# Allegro board 80DB_LIDAR.brd
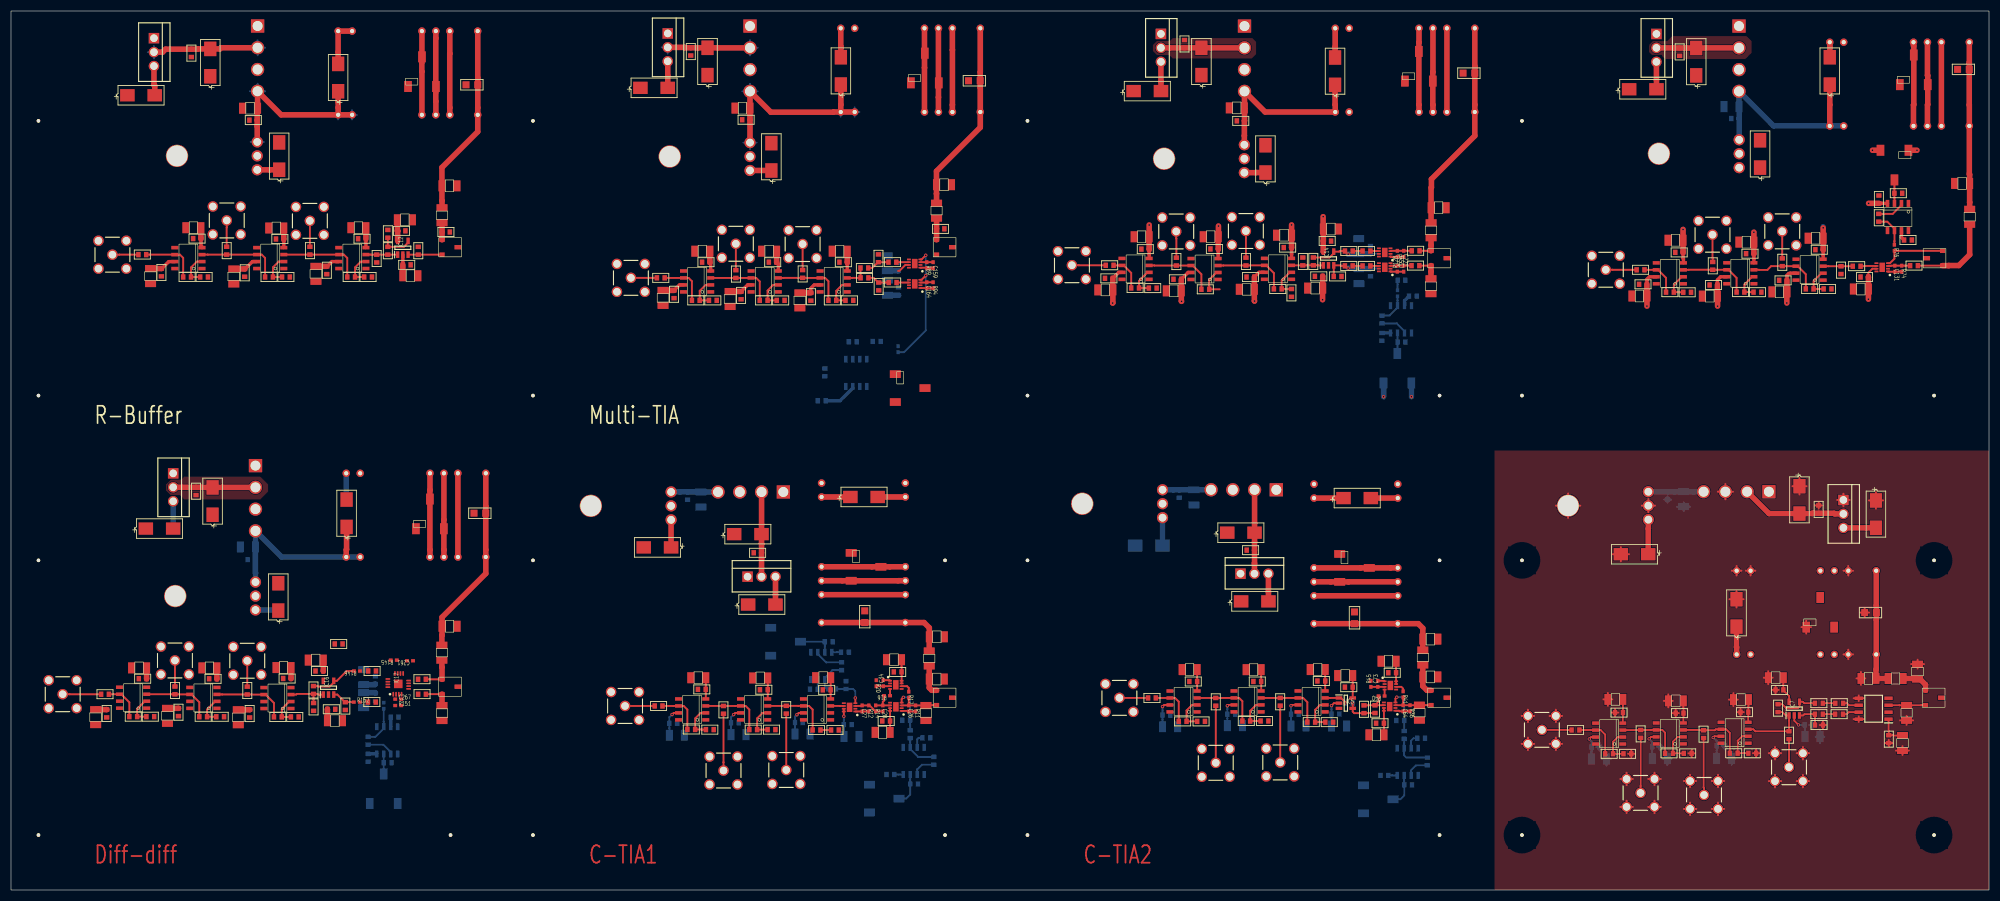
[diagram p0: board, top side]
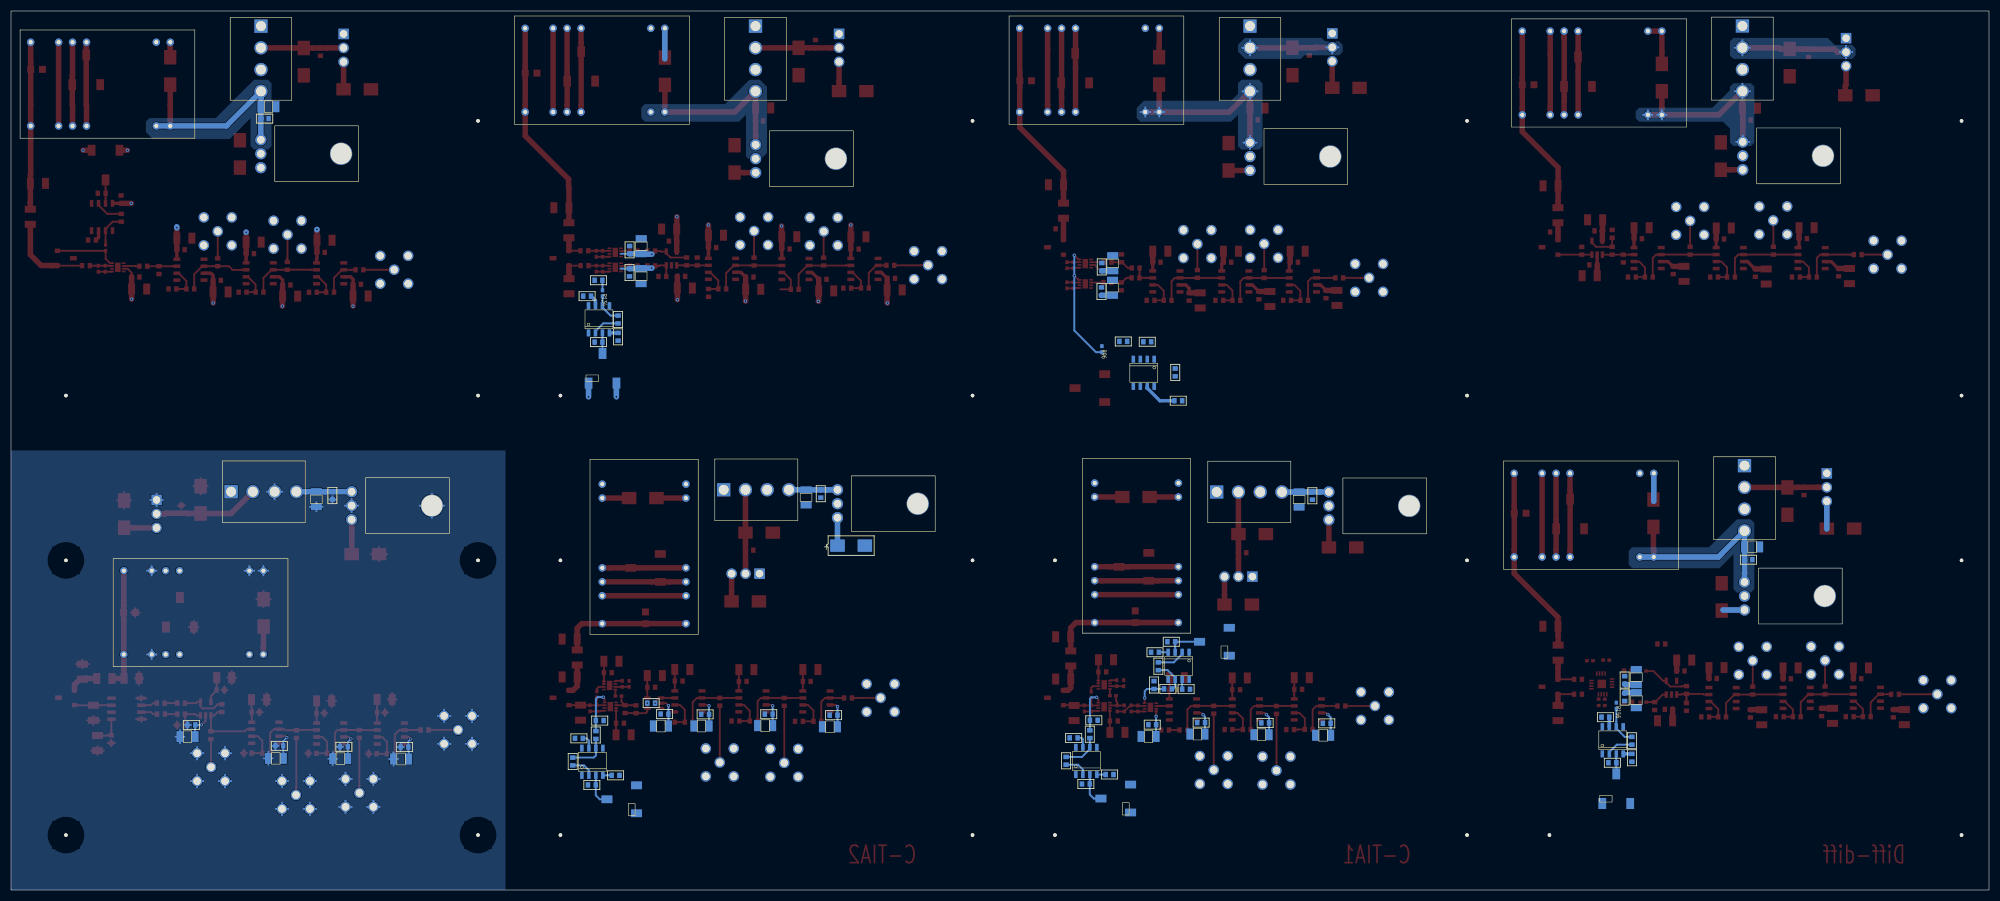
[diagram p1: board, bottom side, seen from below]

Outline 360 x 160 mm; copper layers: TOP, GND, PWD, BOTTOM. Coordinates in mm from the lower left corner of the outline.
Outline path: rectangle 0,0 360,160

## Design rules (mm)
constraint set DEFAULT: min track width 0.127

## Placement (name value [footprint] x y rotation side)
C1  6.8uF_3216  [SMC321612]  125.56 71.08 270 bottom
C2  0.47uF_1608  [SMC1608]  123.14 72.47 270 bottom
C3  10uF_6032  [SMC603212]  120.14 62.36 180 top
C4  47uF_6032  [SMC603212]  152.76 71.54 0 top
C5  4.7nF_2012_250V  [SMC2012]  155.38 48.68 90 top
C6  10uF_6032  [SMC603212]  131.62 64.78 0 top
C7  0.47uF_1608  [SMC1608]  135.18 61.39 0 top
C8  10uF_6032  [SMC603212]  134.16 51.96 0 top
C9  0.1u_1608  [SMC1608]  144.11 30.48 180 bottom
C10  6.8u_3216  [SMC321612]  144.07 28.38 0 bottom
C11  0.1u_1608  [SMC1608]  132.45 30.43 180 bottom
C12  6.8u_3216  [SMC321612]  132.4 28.27 0 bottom
C13  0.1u_1608  [SMC1608]  121.24 30.34 180 bottom
C14  6.8u_3216  [SMC321612]  121.19 28.17 0 bottom
C15  0.1u_1608  [SMC1608]  147.75 36.44 0 top
C16  6.8u_3216  [SMC321612]  147.81 38.65 180 top
C17  0.1u_1608  [SMC1608]  136.31 36.46 0 top
C18  6.8u_3216  [SMC321612]  136.36 38.6 180 top
C19  0.1u_1608  [SMC1608]  125.02 36.52 0 top
C20  6.8u_3216  [SMC321612]  125.08 38.64 180 top
C21  0.1u_1608  [SMC1608]  158.57 30.76 0 top
C22  6.8u_3216  [SMC321612]  158.63 28.69 180 top
C23  0.1u_1608  [SMC1608]  153 30.1 180 bottom
C24  6.8u_3216  [SMC321612]  152.96 27.95 0 bottom
C25  1n_3216  [SMC321612]  168.5 38.4 180 top
C26  0.2p_1005  [SMR1005]  163.4 33.05 270 top
C27  4p_1005  [SMR1005]  154.91 33.05 270 top
C28  1n_1005  [SMR1005]  158.67 33.05 270 top
C29  1n_3216  [SMC321612]  168.51 46.09 180 top
C30  0.1u_1608  [SMC1608]  145.42 36.55 0 bottom
C31  0.1u_1608  [SMC1608]  167.31 27.7 180 bottom
C32  0.1u_1608  [SMC1608]  151.98 36.6 90 bottom
C33  0.1u_1608  [SMC1608]  163.64 30.9 180 bottom
C34  100n_1005  [SMR1005]  158.76 37.64 90 top
C35  0.1u_1608  [SMC1608]  149.54 45.19 180 bottom
C36  0.1u_1608  [SMC1608]  165.08 19.3 180 bottom
C37  0.1u_1608  [SMC1608]  152.5 43.28 180 bottom
C38  0.1u_1608  [SMC1608]  160.67 39.7 0 top
C39  6.8u_3216  [SMC321612]  160.71 41.92 180 top
C40  0.1u_1608  [SMC1608]  159.34 21.02 0 bottom
C41  6.8uF_3216  [SMC321612]  215.3 71.47 270 bottom
C42  0.47uF_1608  [SMC1608]  212.62 72.84 270 bottom
C43  10uF_6032  [SMC603212]  209.58 62.69 180 bottom
C44  47uF_6032  [SMC603212]  242.52 71.34 0 top
C45  4.7nF_2012_250V  [SMC2012]  244.52 48.48 90 top
C46  10uF_6032  [SMC603212]  221.35 65.04 0 top
C47  0.47uF_1608  [SMC1608]  224.9 61.86 0 top
C48  10uF_6032  [SMC603212]  223.88 52.54 0 top
C49  0.1u_1608  [SMC1608]  234.38 31.98 180 bottom
C50  6.8u_3216  [SMC321612]  234.33 29.85 0 bottom
C51  0.1u_1608  [SMC1608]  222.8 32.01 180 bottom
C52  6.8u_3216  [SMC321612]  222.75 29.92 0 bottom
C53  0.1u_1608  [SMC1608]  211 31.83 180 bottom
C54  6.8u_3216  [SMC321612]  210.95 29.71 0 bottom
C55  0.1u_1608  [SMC1608]  237.77 38.04 0 top
C56  6.8u_3216  [SMC321612]  237.82 40.13 180 top
C57  0.1u_1608  [SMC1608]  226.11 37.96 0 top
C58  6.8u_3216  [SMC321612]  226.16 40.11 180 top
C59  0.1u_1608  [SMC1608]  214.46 37.96 0 top
C60  6.8u_3216  [SMC321612]  214.51 40.12 180 top
C61  0.1u_1608  [SMC1608]  248.45 30.36 0 top
C62  6.8u_3216  [SMC321612]  248.51 28.25 180 top
C63  1n_3216  [SMC321612]  258.32 38.79 180 top
C64  0.2p_1005  [SMR1005]  253.37 33.09 270 top
C65  1n_1608  [SMC1608]  248.25 33.63 270 top
C66  1n_3216  [SMC321612]  258.32 45.67 180 top
C67  10u_3216  [SMC321612]  241.71 29.85 0 bottom
C68  0.1u_1608  [SMC1608]  241.76 32.03 180 bottom
C69  10u_3216  [SMC321612]  242.82 39.03 180 top
C70  0.1u_1608  [SMC1608]  242.77 36.92 0 top
C71  0.1u_1608  [SMC1608]  257.35 27.61 180 bottom
C72  0.1u_1608  [SMC1608]  253.56 30.85 180 bottom
C73  100n_1005  [SMR1005]  248.76 37.53 90 top
C74  0.1u_1608  [SMC1608]  254.99 19.13 180 bottom
C75  0.1u_1608  [SMC1608]  249.25 20.87 0 bottom
C76  0.1u_1608  [SMC1608]  250.67 39.55 0 top
C77  6.8u_3216  [SMC321612]  250.72 41.64 180 top
C78  6.8uF_3216  [SMC321612]  304.43 71.13 270 bottom
C79  0.47uF_1608  [SMC1608]  301.5 72.5 270 bottom
C80  10uF_6032  [SMC603212]  297.98 61.12 180 top
C81  47uF_6032  [SMC603212]  314.04 47.95 90 top
C82  4.7nF_2012_250V  [SMC2012]  339.5 50.5 180 top
C83  10uF_6032  [SMC603212]  325.5 73.5 270 top
C84  0.47uF_1608  [SMC1608]  329 70 270 top
C85  10uF_6032  [SMC603212]  339.42 70.91 270 top
C86  0.1u_1608  [SMC1608]  311.88 26.25 180 bottom
C87  6.8u_3216  [SMC321612]  311.8 23.98 0 bottom
C88  0.1u_1608  [SMC1608]  300.12 26.08 180 bottom
C89  6.8u_3216  [SMC321612]  300.07 23.9 0 bottom
C90  0.1u_1608  [SMC1608]  289.1 26.02 180 bottom
C91  6.8u_3216  [SMC321612]  289 23.85 0 bottom
C92  0.1u_1608  [SMC1608]  314.77 32.38 0 top
C93  6.8u_3216  [SMC321612]  314.85 34.65 180 top
C94  0.1u_1608  [SMC1608]  302.98 32.2 0 top
C95  6.8u_3216  [SMC321612]  303 34.42 180 top
C96  0.1u_1608  [SMC1608]  291.95 32.3 0 top
C97  6.8u_3216  [SMC321612]  292 34.7 180 top
C98  100n_1608  [SMC1608]  321.15 36.42 0 top
C99  10u_3216  [SMC321612]  321.19 38.64 180 top
C100  100n_1608  [SMC1608]  327.88 30.05 180 bottom
C101  10u_3216  [SMC321612]  327.87 27.9 0 bottom
C102  10n_1608  [SMC1608]  341.75 26.75 90 top
C103  6.8u_3216  [SMC321612]  344.25 26.75 270 top
C104  1n_3216  [SMC321612]  347 39.75 270 top
C105  0.1u_1608  [SMC1608]  332 32 0 top
C106  0.1u_1608  [SMC1608]  333.45 34 180 top
C107  1n_3216  [SMC321612]  338.06 38.52 0 top
C108  6.8uF_3216  [SMC321612]  313.15 142.58 180 bottom
C109  0.47uF_1608  [SMC1608]  314.53 140.42 180 bottom
C110  10uF_6032  [SMC603212]  318.33 131.49 90 top
C111  47uF_6032  [SMC603212]  331.02 146.6 90 top
C112  4.7nF_2012_250V  [SMC2012]  356.41 149.37 180 top
C113  10uF_6032  [SMC603212]  306.71 148.28 90 top
C114  0.47uF_1608  [SMC1608]  303.69 151.84 90 top
C115  10uF_6032  [SMC603212]  294.5 145.75 0 top
C116  0.1u_1608  [SMC1608]  321.81 110.97 0 top
C117  6.8u_3216  [SMC321612]  321.86 108.87 180 top
C118  0.1u_1608  [SMC1608]  309.14 110.13 0 top
C119  6.8u_3216  [SMC321612]  309.19 108.1 180 top
C120  0.1u_1608  [SMC1608]  296.31 110.25 0 top
C121  6.8u_3216  [SMC321612]  296.38 108.12 180 top
C122  0.1u_1608  [SMC1608]  328.39 116.55 0 top
C123  6.8u_3216  [SMC321612]  328.44 118.64 180 top
C124  0.1u_1608  [SMC1608]  315.79 115.83 0 top
C125  6.8u_3216  [SMC321612]  315.83 117.93 180 top
C126  0.1u_1608  [SMC1608]  302.89 116.06 0 top
C127  6.8u_3216  [SMC321612]  302.94 118.27 180 top
C128  1n_3216  [SMC321612]  355.1 128.61 0 top
C129  0.1u_1608  [SMC1608]  336.62 111.58 0 top
C130  6.8u_3216  [SMC321612]  336.68 109.39 180 top
C131  4p_1005  [SMR1005]  342.86 113.09 270 top
C132  1n_1608  [SMC1608]  347.06 113.65 180 top
C133  1n_1608  [SMC1608]  336.62 113.54 180 top
C134  0.1u_1608  [SMC1608]  345.96 118.31 180 top
C135  0.1u_1608  [SMC1608]  344.2 126.82 180 top
C136  0.1u_1608  [SMC1608]  339.96 126.41 270 top
C137  6.8uF_3216  [SMC321612]  133.13 142.32 180 top
C138  0.47uF_1608  [SMC1608]  134.5 140.2 180 top
C139  10uF_6032  [SMC603212]  138.39 130.97 90 top
C140  47uF_6032  [SMC603212]  151.04 146.61 90 top
C141  4.7nF_2012_250V  [SMC2012]  176.4 147.3 180 top
C142  10uF_6032  [SMC603212]  126.77 148.32 90 top
C143  0.47uF_1608  [SMC1608]  123.71 151.89 90 top
C144  10uF_6032  [SMC603212]  114.55 146.01 0 top
C145  0.1u_1608  [SMC1608]  145.57 107.28 90 top
C146  6.8u_3216  [SMC321612]  143.57 107.33 270 top
C147  0.1u_1608  [SMC1608]  132.88 107.53 90 top
C148  6.8u_3216  [SMC321612]  130.88 107.58 270 top
C149  0.1u_1608  [SMC1608]  120.68 107.72 90 top
C150  6.8u_3216  [SMC321612]  118.68 107.78 270 top
C151  0.1u_1608  [SMC1608]  150.78 114.28 0 top
C152  6.8u_3216  [SMC321612]  150.82 116.28 180 top
C153  0.1u_1608  [SMC1608]  137.93 114.28 0 top
C154  6.8u_3216  [SMC321612]  137.97 116.28 180 top
C155  0.1u_1608  [SMC1608]  125.78 114.28 0 top
C156  6.8u_3216  [SMC321612]  125.82 116.28 180 top
C157  0.1u_1608  [SMC1608]  161.47 114.12 270 bottom
C158  6.8u_3216  [SMC321612]  159.47 114.08 90 bottom
C159  4p_1005  [SMR1005]  167.82 113.72 270 top
C160  1n_1608  [SMC1608]  161.12 114.28 180 top
C161  1n_3216  [SMC321612]  169.81 128.38 180 top
C162  0.1u_1608  [SMC1608]  161.53 109.67 270 bottom
C163  6.8u_3216  [SMC321612]  159.53 109.62 90 bottom
C164  4p_1005  [SMR1005]  166.68 110.08 270 top
C165  1n_1608  [SMC1608]  168.45 120.35 0 top
C166  1n_1608  [SMC1608]  161.18 110.58 180 top
C167  0.1u_1608  [SMC1608]  146.84 89.06 0 bottom
C168  0.1u_1608  [SMC1608]  152.49 99.79 0 bottom
C169  0.1u_1608  [SMC1608]  158.28 99.86 180 bottom
C170  6.8uF_3216  [SMC321612]  43.51 142.3 180 top
C171  0.47uF_1608  [SMC1608]  44.81 140.13 180 top
C172  10uF_6032  [SMC603212]  48.81 131.1 90 top
C173  47uF_6032  [SMC603212]  59.54 145.39 90 top
C174  4.7nF_2012_250V  [SMC2012]  84.95 146.57 180 top
C175  10uF_6032  [SMC603212]  36.27 148.12 90 top
C176  0.47uF_1608  [SMC1608]  32.83 151.62 90 top
C177  10uF_6032  [SMC603212]  21.18 144.66 0 top
C178  0.1u_1608  [SMC1608]  57.47 112.1 90 top
C179  6.8u_3216  [SMC321612]  55.5 112.15 270 top
C180  0.1u_1608  [SMC1608]  42.52 111.62 90 top
C181  6.8u_3216  [SMC321612]  40.55 111.67 270 top
C182  0.1u_1608  [SMC1608]  27.38 111.7 90 top
C183  6.8u_3216  [SMC321612]  25.4 111.75 270 top
C184  0.1u_1608  [SMC1608]  63.17 118.55 0 top
C185  6.8u_3216  [SMC321612]  63.22 120.55 180 top
C186  0.1u_1608  [SMC1608]  48.23 118.5 0 top
C187  6.8u_3216  [SMC321612]  48.27 120.5 180 top
C188  0.1u_1608  [SMC1608]  33.15 118.57 0 top
C189  6.8u_3216  [SMC321612]  33.2 120.55 180 top
C190  0.1u_1608  [SMC1608]  71.79 119.98 180 top
C191  6.8u_3216  [SMC321612]  71.69 121.99 0 top
C192  1n_3216  [SMC321612]  79.8 128.18 180 top
C193  1n_1608  [SMC1608]  78.45 119.78 0 top
C194  0.1u_1608  [SMC1608]  72.74 113.79 180 top
C195  6.8u_3216  [SMC321612]  72.68 111.81 0 top
C196  6.8uF_3216  [SMC321612]  223.1 142.36 180 top
C197  0.47uF_1608  [SMC1608]  224.53 140 180 top
C198  10uF_6032  [SMC603212]  228.31 130.59 90 top
C199  47uF_6032  [SMC603212]  240.98 146.55 90 top
C200  4.7nF_2012_250V  [SMC2012]  266.41 148.69 180 top
C201  10uF_6032  [SMC603212]  216.66 148.32 90 top
C202  0.47uF_1608  [SMC1608]  213.58 154.71 270 top
C203  10uF_6032  [SMC603212]  204.32 145.42 0 top
C204  0.1u_1608  [SMC1608]  224.87 111.57 0 top
C205  6.8u_3216  [SMC321612]  224.92 109.34 180 top
C206  0.1u_1608  [SMC1608]  211.57 111.17 0 top
C207  6.8u_3216  [SMC321612]  211.63 109.06 180 top
C208  0.1u_1608  [SMC1608]  199.11 111.34 0 top
C209  6.8u_3216  [SMC321612]  199.17 109.23 180 top
C210  0.1u_1608  [SMC1608]  231.65 116.94 0 top
C211  6.8u_3216  [SMC321612]  231.69 119.19 180 top
C212  0.1u_1608  [SMC1608]  218.3 116.69 0 top
C213  6.8u_3216  [SMC321612]  218.35 118.91 180 top
C214  0.1u_1608  [SMC1608]  205.72 116.66 0 top
C215  6.8u_3216  [SMC321612]  205.78 118.91 180 top
C216  1n_3216  [SMC321612]  259.83 124.19 180 top
C217  0.1u_1608  [SMC1608]  247.41 117.23 270 bottom
C218  6.8u_3216  [SMC321612]  245.3 117.19 90 bottom
C219  0.1u_1608  [SMC1608]  240.26 118.12 180 top
C220  6.8u_3216  [SMC321612]  240.22 120.31 0 top
C221  4p_1005  [SMR1005]  253.48 115.8 270 top
C222  1n_1608  [SMC1608]  256.36 116.35 180 top
C223  1n_1608  [SMC1608]  247.41 116.31 180 top
C224  0.1u_1608  [SMC1608]  247.43 111.69 90 bottom
C225  6.8u_3216  [SMC321612]  245.31 111.74 270 bottom
C226  4p_1005  [SMR1005]  253.47 113.1 90 top
C227  1n_1608  [SMC1608]  256.32 113.65 180 top
C228  1n_1608  [SMC1608]  247.41 113.6 180 top
C229  1n_1608  [SMC1608]  253.78 110.99 180 bottom
C230  0.1u_1608  [SMC1608]  237.31 111.7 0 top
C231  6.8u_3216  [SMC321612]  237.36 109.56 180 top
C232  0.1u_1608  [SMC1608]  255.86 108.1 180 bottom
C233  0.1u_1608  [SMC1608]  253.78 99.73 180 bottom
C234  0.1u_1608  [SMC1608]  249.51 99.98 90 bottom
C235  6.8uF_3216  [SMC321612]  43.12 62.46 180 bottom
C236  0.47uF_1608  [SMC1608]  44.48 60.13 180 bottom
C237  10uF_6032  [SMC603212]  48.65 50.86 90 top
C238  47uF_6032  [SMC603212]  61.08 66.09 90 top
C239  4.7nF_2012_250V  [SMC2012]  86.4 68.59 180 top
C240  10uF_6032  [SMC603212]  36.69 68.3 90 top
C241  0.47uF_1608  [SMC1608]  33.67 71.88 90 top
C242  10uF_6032  [SMC603212]  24.54 65.79 0 top
C243  0.1u_1608  [SMC1608]  43.43 31.4 90 top
C244  6.8u_3216  [SMC321612]  41.37 31.45 270 top
C245  0.1u_1608  [SMC1608]  30.48 31.65 90 top
C246  6.8u_3216  [SMC321612]  28.48 31.7 270 top
C247  0.1u_1608  [SMC1608]  17.41 31.42 90 top
C248  6.8u_3216  [SMC321612]  15.41 31.47 270 top
C249  0.1u_1608  [SMC1608]  49.54 38.5 0 top
C250  6.8u_3216  [SMC321612]  49.6 40.49 180 top
C251  0.1u_1608  [SMC1608]  36.06 38.45 0 top
C252  6.8u_3216  [SMC321612]  36.11 40.43 180 top
C253  0.1u_1608  [SMC1608]  23.26 38.47 0 top
C254  6.8u_3216  [SMC321612]  23.31 40.43 180 top
C255  6.8u_3216  [SMC321612]  64.19 38.75 90 bottom
C256  6.8u_3216  [SMC321612]  64.19 34.56 270 bottom
C257  0.1u_1608  [SMC1608]  66.31 38.93 270 bottom
C258  0.1u_1608  [SMC1608]  55.42 39.87 0 top
C259  6.8u_3216  [SMC321612]  55.47 41.85 180 top
C260  0.1u_1608  [SMC1608]  66.32 34.41 90 bottom
C261  4p_1005  [SMR1005]  72.62 41.73 180 top
C262  1n_3216  [SMC321612]  79.82 48.01 180 top
C263  1n_1608  [SMC1608]  66.43 39.87 180 top
C264  1n_1608  [SMC1608]  75.51 38.36 180 top
C265  1n_1608  [SMC1608]  75.52 35.64 180 top
C266  1n_1608  [SMC1608]  66.39 34.2 180 top
C267  4p_1005  [SMR1005]  70.48 34.74 0 top
C268  0.1u_1608  [SMC1608]  59.01 32.89 180 top
C269  6.8u_3216  [SMC321612]  58.96 30.82 0 top
C270  1n_1608  [SMC1608]  58.93 44.79 0 top
C271  0.1u_1608  [SMC1608]  70.53 31.47 180 bottom
C272  0.1u_1608  [SMC1608]  69.26 23.17 180 bottom
C273  0.1u_1608  [SMC1608]  64.99 23.36 90 bottom
IC1  OPA855IDSGR  [SON50P200X200X80-9N]  161.05 33.35 180 top
IC2  OPA855IDSGR  [SON50P200X200X80-9N]  152.62 33.25 180 top
IC3  OPA855IDSGR  [SON50P200X200X80-9N]  161.04 37.35 0 top
IC4  OPA855IDSGR  [SON50P200X200X80-9N]  250.92 33.38 180 top
IC5  OPA659IDBVT  [SOT95P280X145-5N]  242.94 34.01 0 top
IC6  OPA855IDSGR  [SON50P200X200X80-9N]  251.05 37.23 0 top
IC7  OPA659IDBVT  [SOT95P280X145-5N]  324.56 33.02 90 top
IC8  MAX3267CSA+  [SOIC127P600X175-8N]  339 33 180 top
IC9  OPA855IDSGR  [SON50P200X200X80-9N]  340.56 113.34 180 top
IC10  OPA855IDSGR  [SON50P200X200X80-9N]  164.47 114.03 180 top
IC11  OPA855IDSGR  [SON50P200X200X80-9N]  164.47 110.33 180 top
IC12  OPA659IDBVT  [SOT95P280X145-5N]  71.32 116.9 90 top
IC13  OPA855IDSGR  [SON50P200X200X80-9N]  250.02 116.05 180 top
IC14  OPA659IDBVT  [SOT95P280X145-5N]  239.79 114.95 90 top
IC15  OPA855IDSGR  [SON50P200X200X80-9N]  250.02 113.35 180 top
IC16  OPA659IDBVT  [SOT95P280X145-5N]  57.79 36.82 90 top
IC17  THS4509RGTT  [QFN50P300X300X100-17N-D]  70.48 37.52 90 top
JP1  4 HEADER  [HEADER4]  134.62 72.45 90 bottom
JP2  4 HEADER  [HEADER4]  224.35 72.85 90 bottom
JP3  4 HEADER  [HEADER4]  314 72.5 90 bottom
JP4  4 HEADER  [HEADER4]  314.5 151.31 180 bottom
JP5  4 HEADER  [HEADER4]  134.5 151.31 180 bottom
JP6  4 HEADER  [HEADER4]  44.88 151.33 180 bottom
JP7  4 HEADER  [HEADER4]  224.5 151.31 180 bottom
JP8  4 HEADER  [HEADER4]  44.5 71.31 180 bottom
NOREF  -  [unnamed]  80 10 0 top
NOREF#2  -  [unnamed]  170 60 0 top
NOREF#3  -  [unnamed]  5 60 0 top
NOREF#4  -  [unnamed]  185 90 0 top
NOREF#5  -  [unnamed]  170 10 0 top
NOREF#6  -  [unnamed]  185 10 0 top
NOREF#7  -  [unnamed]  95 60 0 top
NOREF#8  -  [unnamed]  275 10 0 top
NOREF#9  -  [unnamed]  260 60 0 top
NOREF#10  -  [unnamed]  260 90 0 top
NOREF#11  -  [unnamed]  5 140 0 top
NOREF#12  -  [unnamed]  185 60 0 top
NOREF#13  -  [unnamed]  350 10 0 top
NOREF#14  -  [unnamed]  95 90 0 top
NOREF#15  -  [unnamed]  95 10 0 top
NOREF#16  -  [unnamed]  5 10 0 top
NOREF#17  -  [unnamed]  275 90 0 top
NOREF#18  -  [unnamed]  260 10 0 top
NOREF#19  -  [unnamed]  275 140 0 top
NOREF#20  -  [unnamed]  5 90 0 top
NOREF#21  -  [unnamed]  350 90 0 top
NOREF#22  -  [unnamed]  350 60 0 top
NOREF#23  -  [unnamed]  95 140 0 top
NOREF#24  -  [unnamed]  275 60 0 top
NOREF#25  -  [unnamed]  185 140 0 top
R1  5 kohm  [ST5EW]  152.92 61.37 0 top
R2  390_1608  [SMR1608]  145.9 29.12 0 top
R3  390_1608  [SMR1608]  134.38 29.2 0 top
R4  390_1608  [SMR1608]  123.1 29.23 0 top
R5  36_1608  [SMR1608]  149.25 29.12 0 top
R6  36_1608  [SMR1608]  137.7 29.2 0 top
R7  36_1608  [SMR1608]  126.47 29.2 0 top
R8  50_1608  [SMR1608]  141.1 33.52 270 top
R9  50_1608  [SMR1608]  129.68 33.5 270 top
R10  50_1608  [SMR1608]  118.57 33.5 180 top
R11  5M_1005  [SMR1005]  164.64 33.05 270 top
R12  1k_1005  [SMR1005]  156.12 33.05 270 top
R13  20k_3216  [SMR3216]  167.12 42.15 270 top
R14  200_1005  [SMR1005]  157.37 33.05 270 top
R15  NC_3216  [SMR3216]  166.52 32.22 270 top
R16  80k_1005  [SMR1005]  159.44 35.37 180 top
R17  5M_1005  [SMR1005]  163.4 35.55 270 top
R18  200_1608  [SMR1608]  151.18 40.02 90 bottom
R19  200_1608  [SMR1608]  167.97 24.23 270 bottom
R20  80k_1005  [SMR1005]  157.48 37.64 270 top
R21  20 kohm  [ST5EW]  138.28 42.65 0 bottom
R22  10_1608  [SMC1608]  150.15 36.6 180 bottom
R23  20 kohm  [ST5EW]  156.24 14.11 0 bottom
R24  10_1608  [SMC1608]  163.65 29.07 270 bottom
R25  5 kohm  [ST5EW]  241.82 61.17 0 top
R26  390_1608  [SMR1608]  235.94 30.55 0 top
R27  390_1608  [SMR1608]  224.11 30.76 0 top
R28  390_1608  [SMR1608]  212.53 30.7 0 top
R29  36_1608  [SMR1608]  239.21 30.55 0 top
R30  36_1608  [SMR1608]  227.43 30.76 0 top
R31  36_1608  [SMR1608]  215.88 30.7 0 top
R32  50_1608  [SMR1608]  231 34.97 270 top
R33  50_1608  [SMR1608]  219.27 34.96 270 top
R34  50_1608  [SMR1608]  208.37 34.96 180 top
R35  200_1608  [SMC1608]  244.2 34.02 180 bottom
R36  5M_1005  [SMR1005]  254.62 33.09 270 top
R37  20k_3216  [SMR3216]  256.95 42.32 270 top
R38  200_1608  [SMR1608]  246.25 33.61 270 top
R39  NC_3216  [SMR3216]  256.34 32.28 270 top
R40  80k_1005  [SMR1005]  249.44 35.31 180 top
R41  5M_1005  [SMR1005]  253.37 35.61 270 top
R42  200_1608  [SMR1608]  257.76 24.11 270 bottom
R43  20 kohm  [ST5EW]  246.15 13.97 0 bottom
R44  10_1608  [SMC1608]  253.56 28.93 270 bottom
R45  80k_1005  [SMR1005]  247.5 37.53 90 top
R46  5 kohm  [ST5EW]  326.73 47.85 90 top
R47  390_1608  [SMR1608]  312.82 24.9 0 top
R48  390_1608  [SMR1608]  301.05 24.88 0 top
R49  390_1608  [SMR1608]  290.15 24.8 0 top
R50  36_1608  [SMR1608]  316.2 24.9 0 top
R51  36_1608  [SMR1608]  304.45 24.88 0 top
R52  36_1608  [SMR1608]  293.48 24.8 0 top
R53  50_1608  [SMR1608]  308.05 29.08 270 top
R54  50_1608  [SMR1608]  296.6 29.12 270 top
R55  50_1608  [SMR1608]  285.45 29.12 180 top
R56  50_1608  [SMR1608]  323.6 28.89 270 top
R57  249_1608  [SMC1608]  321.6 32.39 90 top
R58  249_1608  [SMC1608]  329.75 32 180 top
R59  20k_3216  [SMR3216]  343 38.5 0 top
R60  249_1608  [SMC1608]  329.75 34 180 top
R61  249_1608  [SMC1608]  328.35 30.03 0 top
R62  NC_3216  [SMR3216]  345 32.25 270 top
R63  5 kohm  [ST5EW]  343.77 146.6 90 top
R64  390_1608  [SMR1608]  326.65 109.41 0 top
R65  390_1608  [SMR1608]  314.06 108.83 0 top
R66  390_1608  [SMR1608]  301.21 108.82 0 top
R67  36_1608  [SMR1608]  329.9 109.41 0 top
R68  36_1608  [SMR1608]  317.14 108.82 0 top
R69  36_1608  [SMR1608]  304.35 108.8 0 top
R70  50_1608  [SMR1608]  322.38 113.55 90 top
R71  50_1608  [SMR1608]  309.71 112.9 90 top
R72  50_1608  [SMR1608]  297.3 112.89 180 top
R73  20k_3216  [SMR3216]  356.48 122.54 270 top
R74  1k_1005  [SMR1005]  344.12 113.09 270 top
R75  200_1608  [SMR1608]  333.06 113.54 270 top
R76  1k_1005  [SMR1005]  342.78 116.9 270 top
R77  200_1608  [SMR1608]  339.93 121.65 90 top
R78  20 kohm  [ST5EW]  345.33 134.65 270 top
R79  5 kohm  [ST5EW]  163.78 146.92 90 top
R80  390_1608  [SMR1608]  148.78 107.33 0 top
R81  390_1608  [SMR1608]  136.28 107.33 0 top
R82  390_1608  [SMR1608]  123.93 107.33 0 top
R83  36_1608  [SMR1608]  151.88 107.33 0 top
R84  36_1608  [SMR1608]  139.38 107.33 0 top
R85  36_1608  [SMR1608]  127.03 107.33 0 top
R86  50_1608  [SMR1608]  144.07 111.42 90 top
R87  50_1608  [SMR1608]  131.93 111.41 90 top
R88  50_1608  [SMR1608]  118.97 111.42 180 top
R89  1k_1005  [SMR1005]  166.68 113.72 270 top
R90  200_1608  [SMR1608]  157.88 114.28 90 top
R91  0_1608  [SMR1608]  156.03 113.22 180 top
R92  20k_3216  [SMR3216]  168.45 123.65 270 top
R93  0_1608  [SMR1608]  154.62 111.42 0 top
R94  1k_1005  [SMR1005]  167.82 110.08 270 top
R95  200_1608  [SMR1608]  157.93 110.58 270 top
R96  1k_1005  [SMR1005]  161.45 98.44 270 bottom
R97  200_1608  [SMR1608]  148.12 93.5 90 bottom
R98  20 kohm  [ST5EW]  160.95 93.9 0 top
R99  5 kohm  [ST5EW]  72.26 146.26 90 top
R100  390_1608  [SMR1608]  61.2 111.58 0 top
R101  390_1608  [SMR1608]  46.25 111.58 0 top
R102  390_1608  [SMR1608]  31.34 111.58 0 top
R103  36_1608  [SMR1608]  64.28 111.58 0 top
R104  36_1608  [SMR1608]  49.33 111.58 0 top
R105  36_1608  [SMR1608]  34.43 111.58 0 top
R106  50_1608  [SMR1608]  54.4 115.66 90 top
R107  50_1608  [SMR1608]  39.25 115.66 90 top
R108  50_1608  [SMR1608]  24.61 115.66 180 top
R109  200_1608  [SMR1608]  68.58 115.65 90 top
R110  200_1608  [SMR1608]  68.58 118.73 90 top
R111  20k_3216  [SMR3216]  78.45 122.82 270 top
R112  10_1608  [SMR1608]  74.12 115.65 90 top
R113  5 kohm  [ST5EW]  253.69 147.24 90 top
R114  390_1608  [SMR1608]  229.84 109.42 0 top
R115  390_1608  [SMR1608]  216.65 109.34 0 top
R116  390_1608  [SMR1608]  203.88 109.58 0 top
R117  36_1608  [SMR1608]  233.05 109.4 270 top
R119  36_1608  [SMR1608]  207.09 109.56 0 top
R120  50_1608  [SMR1608]  224.76 113.68 90 top
R121  50_1608  [SMR1608]  212.1 113.67 90 top
R122  50_1608  [SMR1608]  200.67 113.71 180 top
R123  20k_3216  [SMR3216]  258.46 120.09 270 top
R124  1k_1005  [SMR1005]  252.32 115.8 270 top
R125  70_1608  [SMR1608]  244.2 116.31 180 top
R126  130_1608  [SMR1608]  237.03 115.13 270 top
R127  100_1608  [SMR1608]  235.11 113.7 90 top
R128  1k_1005  [SMR1005]  252.31 113.1 90 top
R129  20k_3216  [SMR3216]  258.44 109.91 90 top
R130  70_1608  [SMR1608]  242.77 113.61 0 top
R131  130_1608  [SMR1608]  242.16 111.68 180 top
R132  200_1608  [SMR1608]  249.51 104.56 270 bottom
R133  20 kohm  [ST5EW]  254.88 92.26 90 bottom
R134  1k_1005  [SMR1005]  252.35 108.61 270 bottom
R135  5 kohm  [ST5EW]  73.7 65.76 90 top
R136  390_1608  [SMR1608]  47.86 31.51 0 top
R137  390_1608  [SMR1608]  34.27 31.54 0 top
R138  390_1608  [SMR1608]  21.54 31.56 0 top
R139  36_1608  [SMR1608]  50.94 31.51 0 top
R140  36_1608  [SMR1608]  37.36 31.54 0 top
R141  36_1608  [SMR1608]  24.64 31.56 0 top
R142  50_1608  [SMR1608]  43 35.59 90 top
R143  50_1608  [SMR1608]  29.84 35.62 90 top
R144  50_1608  [SMR1608]  17.82 35.63 180 top
R145  1k_1005  [SMR1005]  69.67 41.84 180 top
R146  70_1608  [SMR1005]  62.97 39.86 180 top
R147  130_1608  [SMR1608]  55.06 37.12 270 top
R148  20k_3216  [SMR3216]  78.42 43.2 270 top
R149  100_1608  [SMR1608]  55.07 34.04 270 top
R150  20k_3216  [SMR3216]  78.44 32.21 270 top
R151  1k_1005  [SMR1005]  70.48 33.58 0 top
R152  70_1608  [SMR1005]  62.94 34.2 0 top
R153  130_1608  [SMR1608]  60.85 32.77 90 top
R154  200_1608  [SMR1608]  64.99 27.88 270 bottom
R155  20 kohm  [ST5EW]  70.38 15.75 90 bottom
R156  1k_1005  [SMR1005]  67.83 33.55 270 bottom
R157  200_1608  [SMR1608]  66.56 115.65 270 top
U1  LM2940  [LM2940_TO220]  120.14 72.46 270 bottom
U2  R12_150B  [R12_150]  155.15 62.65 180 bottom
U3  LM2990  [LM2990_TO220AB]  134.06 57.04 0 top
U4  OPA695  [SOIC8]  146.7 32.88 180 top
U5  OPA695  [SOIC8]  135.25 32.88 180 top
U6  OPA695  [SOIC8]  123.97 32.88 180 top
U7  SMA_CON  [RFSMAV]  141.1 21.85 0 top
U8  SMA_CON  [RFSMAV]  129.68 21.75 0 top
U9  SMA_CON  [RFSMAV]  111.76 33.5 0 top
U10  mtapd_07_013  [LCC3_SMD]  171.35 35 270 top
U11  -  [OPA277]  147.48 40.8 270 bottom
U12  -  [OPA277]  164.29 23.49 90 bottom
U13  LM2940  [LM2940_TO220]  209.58 72.85 270 bottom
U14  R12_150B  [R12_150]  244.78 62.45 180 bottom
U15  LM2990  [LM2990_TO220AB]  223.77 57.58 0 top
U16  OPA695  [SOIC8]  236.71 34.33 180 top
U17  OPA695  [SOIC8]  225.06 34.33 180 top
U18  OPA695  [SOIC8]  213.41 34.32 180 top
U19  SMA_CON  [RFSMAV]  231 23.22 0 top
U20  SMA_CON  [RFSMAV]  219.27 23.15 0 top
U21  SMA_CON  [RFSMAV]  201.73 34.97 0 top
U22  mtapd_07_013  [LCC3_SMD]  261.35 35 270 top
U23  -  [OPA277]  254.19 23.34 90 bottom
U24  LM2940  [LM2940_TO220]  298 72.5 270 bottom
U25  R12_150B  [R12_150]  325.5 50.5 270 bottom
U26  LM2990  [LM2990_TO220AB]  333.5 71 270 top
U27  OPA695  [SOIC8]  313.7 28.62 180 top
U28  OPA695  [SOIC8]  301.9 28.5 180 top
U29  OPA695  [SOIC8]  290.88 28.48 180 top
U30  SMA_CON  [RFSMAV]  308.13 17.3 0 top
U31  SMA_CON  [RFSMAV]  296.58 17.67 0 top
U32  SMA_CON  [RFSMAV]  278.62 29.15 0 top
U33  SMA_CON  [RFSMAV]  323.59 22.36 0 top
U34  mtapd_07_013  [LCC3_SMD]  351.35 35 270 top
U35  LM2940  [LM2940_TO220]  314.53 136.56 270 bottom
U36  R12_150B  [R12_150]  342.44 146.69 270 bottom
U37  LM2990  [LM2990_TO220AB]  299.47 155.82 270 top
U38  OPA695  [SOIC8]  327.35 112.91 180 top
U39  OPA695  [SOIC8]  314.74 112.26 180 top
U40  OPA695  [SOIC8]  301.92 112.25 180 top
U41  SMA_CON  [RFSMAV]  322.37 119.89 0 top
U42  SMA_CON  [RFSMAV]  309.68 119.28 0 top
U43  SMA_CON  [RFSMAV]  290.25 112.9 0 top
U44  mtapd_07_013  [LCC3_SMD]  348.65 115 90 top
U45  -  [OPA277]  343.43 122.5 270 top
U46  LM2940  [LM2940_TO220]  134.5 136.05 270 bottom
U47  R12_150B  [R12_150]  162.44 149.24 270 bottom
U48  LM2990  [LM2990_TO220AB]  119.53 155.92 270 top
U49  OPA695  [SOIC8]  149.72 110.78 180 top
U50  OPA695  [SOIC8]  137.18 110.78 180 top
U51  OPA695  [SOIC8]  124.88 110.78 180 top
U52  SMA_CON  [RFSMAV]  144.07 117.58 0 top
U53  SMA_CON  [RFSMAV]  131.93 117.62 0 top
U54  SMA_CON  [RFSMAV]  112.83 111.42 0 top
U55  mtapd_07_013  [LCC3_SMD]  171.35 117 270 top
U56  -  [OPA277]  153.83 94.14 270 bottom
U57  LM2940  [LM2940_TO220]  44.82 136.17 270 bottom
U58  R12_150B  [R12_150]  70.97 148.72 270 bottom
U59  LM2990  [LM2990_TO220AB]  26.02 155.05 270 top
U60  OPA695  [SOIC8]  62.12 115.03 180 top
U61  OPA695  [SOIC8]  47.17 115.03 180 top
U62  OPA695  [SOIC8]  32.29 115.02 180 top
U63  SMA_CON  [RFSMAV]  54.4 121.8 0 top
U64  SMA_CON  [RFSMAV]  39.27 121.88 0 top
U65  SMA_CON  [RFSMAV]  18.46 115.64 0 top
U66  mtapd_07_013  [LCC3_SMD]  81.35 117 270 top
U67  LM2940  [LM2940_TO220]  224.47 135.65 270 bottom
U68  R12_150B  [R12_150]  252.44 149.24 270 bottom
U69  LM2990  [LM2990_TO220AB]  209.29 155.83 270 top
U70  OPA695  [SOIC8]  230.59 113.06 180 top
U71  OPA695  [SOIC8]  217.22 113.03 180 top
U72  OPA695  [SOIC8]  204.68 113.06 180 top
U73  SMA_CON  [RFSMAV]  224.75 119.95 0 top
U74  SMA_CON  [RFSMAV]  212.07 119.87 0 top
U75  SMA_CON  [RFSMAV]  193.09 113.73 0 top
U76  mtapd_07_013  [LCC3_SMD]  261.35 115 270 top
U77  -  [OPA277]  252.99 103.88 90 bottom
U78  LM2940  [LM2940_TO220]  44.5 56.05 270 bottom
U79  R12_150B  [R12_150]  72.44 68.23 270 bottom
U80  LM2990  [LM2990_TO220AB]  29.52 75.84 270 top
U81  OPA695  [SOIC8]  48.49 34.94 180 top
U82  OPA695  [SOIC8]  35.01 34.97 180 top
U83  OPA695  [SOIC8]  22.22 35 180 top
U84  SMA_CON  [RFSMAV]  43 41.73 0 top
U85  SMA_CON  [RFSMAV]  29.84 41.78 0 top
U86  SMA_CON  [RFSMAV]  9.41 35.64 0 top
U87  mtapd_07_013  [LCC3_SMD]  81.35 37 270 top
U88  -  [OPA277]  68.47 27.25 90 bottom

## Library data of the parts
C1 C10 C12 C14 C16 C18 C20 C22 C24-C29 C34 C39 C41 C50 C52 C54 C56 C58 C60 C62-C67 C69 C73 C77 C78 C87 C89 C91 C93 C95 C97 C99 C101 C103-C108 C117 C119 C121 C123 C125 C127 C128 C130-C133 C137 C146 C148 C150 C152 C154 C156 C158-C161 C163-C166 C170 C179 C181 C183 C185 C187 C189 C191-C193 C195 C196 C205 C207 C209 C211 C213 C215 C216 C218 C220-C223 C225-C229 C231 C235 C244 C246 C248 C250 C252 C254-C256 C259 C261-C267 C269 C270 = CAP_3216
C2 C7 C9 C11 C13 C15 C17 C19 C21 C23 C30-C33 C35-C38 C40 C42 C47 C49 C51 C53 C55 C57 C59 C61 C68 C70-C72 C74-C76 C79 C84 C86 C88 C90 C92 C94 C96 C98 C100 C102 C109 C114 C116 C118 C120 C122 C124 C126 C129 C134-C136 C138 C143 C145 C147 C149 C151 C153 C155 C157 C162 C167-C169 C171 C176 C178 C180 C182 C184 C186 C188 C190 C194 C197 C202 C204 C206 C208 C210 C212 C214 C217 C219 C224 C230 C232-C234 C236 C241 C243 C245 C247 C249 C251 C253 C257 C258 C260 C268 C271-C273 = CAP_1608
C3 C4 C6 C8 C43 C44 C46 C48 C80 C81 C83 C85 C110 C111 C113 C115 C139 C140 C142 C144 C172 C173 C175 C177 C198 C199 C201 C203 C237 C238 C240 C242 = CAP POL
C5 C45 C82 C112 C141 C174 C200 C239 = CAP_2012
IC1-IC4 IC6 IC9-IC11 IC13 IC15 = OPA855IDSGR_0
IC5 IC12 IC14 IC16 = OPA659IDBVT_8
IC7 = OPA659IDBVT_10
IC8 = MAX3267CSA+
IC17 = THS4509RGTT
JP1-JP8 = 4 HEADER_0
R1 R21 R23 R25 R43 R46 R63 R78 R79 R98 R99 R113 R133 R135 R155 = RESISTOR VAR_0
R2-R10 R26-R34 R47-R56 R64-R72 R80-R88 R100-R108 R114-R117 R119-R122 R136-R144 = R_1608
R11-R20 R22 R24 R35-R42 R44 R45 R57-R62 R73-R77 R89-R97 R109-R112 R123-R132 R134 R145-R154 R156 R157 = R_3216
U1 U13 U24 U35 U46 U57 U67 U78 = LM2940
U2 U14 U25 U36 U47 U58 U68 U79 = R12_150B
U3 U15 U26 U37 U48 U59 U69 U80 = LM2990
U4-U6 U16-U18 U27-U29 U38-U40 U49-U51 U60-U62 U70-U72 U81-U83 = OPA695: Tolerance: ***; User Part Number: ***
U7-U9 U19-U21 U30-U33 U41-U43 U52-U54 U63-U65 U73-U75 U84-U86 = SMA_CON
U10 U22 U34 U44 U55 U66 U76 U87 = mtapd_07_013
U11 U12 U23 U45 U56 U77 U88 = OPA277: Tolerance: ***; User Part Number: ***

## Footprints (pads in the part's own frame, mm; a bottom-side part is the same pattern mirrored in y, then rotated)
HEADER4
  rect 2.41x2.41 hole 1.8: 1(0,5.94)
  round 2.41 hole 1.8: 2(0,1.98) 3(0,-1.98) 4(0,-5.94)
LCC3_SMD
  rect 0.8x1.25 smd: 1(0,0)
  rect 0.8x0.95 smd: 2(-1.35,-2.9) 3(1.35,-2.9)
LM2940_TO220
  round 2.032 hole 1.397: 1(0,0) 2(2.54,0) 3(5.08,0)
  round 4.064 hole 3.81: 4(2.54,14.605)
LM2990_TO220AB
  rect 1.905x1.905 hole 1.372: 1(0,0)
  round 1.905 hole 1.372: 2(2.54,0) 3(5.08,0)
OPA277
  rect 1.27x0.635 smd: 1(-2.477,1.905) 2(-2.477,0.635) 3(-2.477,-0.635) 4(-2.477,-1.905) 5(2.477,-1.905) 6(2.477,-0.635) 7(2.477,0.635) 8(2.477,1.905)
QFN50P300X300X100-17N-D
  custom 0.85x0.3 smd: 1(-1.875,0.9) 2(-1.875,0.4) 3(-1.875,-0.1) 4(-1.875,-0.6) 9(1.875,-0.9) 10(1.875,-0.4) 11(1.875,0.1) 12(1.875,0.6)
  custom 0.3x0.85 smd: 5(-0.9,-1.875) 6(-0.4,-1.875) 7(0.1,-1.875) 8(0.6,-1.875) 13(0.9,1.875) 14(0.4,1.875) 15(-0.1,1.875) 16(-0.6,1.875)
  rect 1.55x1.55 smd: 17(0,0)
R12_150
  round 1.36 hole 0.75: 2(-7.62,11.43) 3(-7.62,8.89) 8(-7.62,-3.81) 9(-7.62,-6.35) 10(-7.62,-8.89) 12(-7.62,-13.97) 13(7.62,-13.97) 15(7.62,-8.89) 16(7.62,-6.35) 17(7.62,-3.81) 22(7.62,8.89) 23(7.62,11.43)
RFSMAV
  round 1.905 hole 1.372: 1(0,0) 2(-2.54,-2.54) 3(2.54,-2.54) 4(2.54,2.54) 5(-2.54,2.54)
SMC1608
  rect 0.813x0.965 smd: 1(0,0) 2(1.422,0)
SMC2012
  rect 1.27x1.27 smd: 1(0,0) 2(2.134,0)
SMC321612
  rect 1.27x2.007 smd: 1(-1.372,0) 2(1.372,0)
SMC603212
  rect 2.642x2.235 smd: 1(0,0) 2(4.978,0)
SMR1005
  rect 0.7x0.6 smd: 1(-0.55,0) 2(0.55,0)
SMR1608
  rect 0.813x0.965 smd: 1(0,0) 2(1.422,0)
SMR3216
  rect 1.27x2.007 smd: 1(-1.372,0) 2(1.372,0)
SOIC8
  rect 1.27x0.635 smd: 1(-2.477,1.905) 2(-2.477,0.635) 3(-2.477,-0.635) 4(-2.477,-1.905) 5(2.477,-1.905) 6(2.477,-0.635) 7(2.477,0.635) 8(2.477,1.905)
SOIC127P600X175-8N
  rect 1.525x0.65 smd: 1(-2.712,1.905) 2(-2.712,0.635) 3(-2.712,-0.635) 4(-2.712,-1.905) 5(2.712,-1.905) 6(2.712,-0.635) 7(2.712,0.635) 8(2.712,1.905)
SON50P200X200X80-9N
  rect 0.7x0.3 smd: 1(-1.05,0.75) 2(-1.05,0.25) 3(-1.05,-0.25) 4(-1.05,-0.75) 5(1.05,-0.75) 6(1.05,-0.25) 7(1.05,0.25) 8(1.05,0.75)
  rect 1x1.7 smd: 9(0,0)
SOT95P280X145-5N
  rect 1.2x0.6 smd: 1(-1.25,0.95) 2(-1.25,0) 3(-1.25,-0.95) 4(1.25,-0.95) 5(1.25,0.95)
ST5EW
  rect 2x1.4 smd: 1(0,0) 2(0,-5.08) 3(5.397,-2.54)
unnamed
  round 0.635 hole 6.002 unplated: (0,0)

## Nets
12V_1: C108.1 C109.1 C111.1 JP4.4 U35.1 U36.22 U36.23
12V_2: C196.1 C197.1 C199.1 JP7.4 U67.1 U68.22 U68.23
12V_3: C137.1 C138.1 C140.1 JP5.4 U46.1 U47.22 U47.23
12V_4: C235.1 C236.1 C238.1 JP8.4 U78.1 U79.22 U79.23
12V_5: C170.1 C171.1 C173.1 JP6.4 U57.1 U58.22 U58.23
12V_6: C1.1 C2.1 C4.1 JP1.4 U1.1 U2.22 U2.23
12V_7: C41.1 C42.1 C44.1 JP2.4 U13.1 U14.22 U14.23
12V_8: C78.1 C79.1 C81.1 JP3.4 U24.1 U25.22 U25.23
-12V_1: C113.2 C114.2 JP4.2 U37.2
-12V_2: C201.2 C202.2 JP7.2 U69.2
-12V_3: C142.2 C143.2 JP5.2 U48.2
-12V_4: C240.2 C241.2 JP8.2 U80.2
-12V_5: C175.2 C176.2 JP6.2 U59.2
-12V_6: C6.2 C7.2 JP1.2 U3.2
-12V_7: C46.2 C47.2 JP2.2 U15.2
-12V_8: C83.2 C84.2 JP3.2 U26.2
GND: C1.2 C2.2 C3.2 C4.2 C5.2 C6.1 C7.1 C8.1 C9.1 C10.2 C11.1 C12.2 C13.1 C14.2 C15.1 C16.2 C17.1 C18.2 C19.1 C20.2 C21.1 C22.2 C23.1 C24.2 C25.1 C29.1 C30.1 C31.1 C32.2 C33.2 C35.1 C36.1 C37.1 C38.1 C39.2 C40.1 C41.2 C42.2 C43.2 C44.2 C45.2 C46.1 C47.1 C48.1 C49.1 C50.2 C51.1 C52.2 C53.1 C54.2 C55.1 C56.2 C57.1 C58.2 C59.1 C60.2 C61.1 C62.2 C63.1 C66.1 C67.2 C68.1 C69.2 C70.1 C71.1 C72.2 C74.1 C75.1 C76.1 C77.2 C78.2 C79.2 C80.2 C81.2 C82.2 C83.1 C84.1 C85.1 C86.1 C87.2 C88.1 C89.2 C90.1 C91.2 C92.1 C93.2 C94.1 C95.2 C96.1 C97.2 C98.1 C99.2 C100.1 C101.2 C102.1 C103.2 C104.1 C107.1 C108.2 C109.2 C110.2 C111.2 C112.2 C113.1 C114.1 C115.1 C116.1 C117.2 C118.1 C119.2 C120.1 C121.2 C122.1 C123.2 C124.1 C125.2 C126.1 C127.2 C128.1 C129.1 C130.2 C134.1 C135.1 C136.1 C137.2 C138.2 C139.2 C140.2 C141.2 C142.1 C143.1 C144.1 C145.1 C146.2 C147.1 C148.2 C149.1 C150.2 C151.1 C152.2 C153.1 C154.2 C155.1 C156.2 C157.1 C158.2 C161.1 C162.1 C163.2 C165.2 C167.1 C168.1 C169.1 C170.2 C171.2 C172.2 C173.2 C174.2 C175.1 C176.1 C177.1 C178.1 C179.2 C180.1 C181.2 C182.1 C183.2 C184.1 C185.2 C186.1 C187.2 C188.1 C189.2 C190.1 C191.2 C192.1 C193.2 C194.1 C195.2 C196.2 C197.2 C198.2 C199.2 C200.2 C201.1 C202.1 C203.1 C204.1 C205.2 C206.1 C207.2 C208.1 C209.2 C210.1 C211.2 C212.1 C213.2 C214.1 C215.2 C216.1 C217.1 C218.2 C219.1 C220.2 C224.1 C225.2 C229.1 C230.1 C231.2 C232.1 C233.1 C234.1 C235.2 C236.2 C237.2 C238.2 C239.2 C240.1 C241.1 C242.1 C243.1 C244.2 C245.1 C246.2 C247.1 C248.2 C249.1 C250.2 C251.1 C252.2 C253.1 C254.2 C255.2 C256.2 C257.1 C258.1 C259.2 C260.1 C262.1 C268.1 C269.2 C270.1 C271.1 C272.1 C273.1 IC1.5(VS-) IC1.9 IC2.5(VS-) IC2.9 IC3.5(VS-) IC3.9 IC4.5(VS-) IC4.9 IC5.3 IC6.5(VS-) IC6.9 IC8.5 IC8.8 IC9.5(VS-) IC9.9 IC10.5(VS-) IC10.9 IC11.5(VS-) IC11.9 IC13.5(VS-) IC13.9 IC15.5(VS-) IC15.9 IC17.13 IC17.14 IC17.15 IC17.16(VS-_4) IC17.17 JP1.3 JP2.3 JP3.3 JP4.3 JP5.3 JP6.3 JP7.3 JP8.3 R1.1 R5.2 R6.2 R7.2 R15.2 R20.1 R25.1 R29.2 R30.2 R31.2 R39.2 R45.2 R46.1 R50.2 R51.2 R52.2 R61.2 R62.2 R63.1 R67.2 R68.2 R69.2 R75.2 R79.1 R83.2 R84.2 R85.2 R90.2 R95.2 R99.1 R103.2 R104.2 R105.2 R110.2 R112.2 R113.1 R117.2 R119.2 R127.2 R129.1 R131.1 R135.1 R139.2 R140.2 R141.2 R149.2 R150.2 R153.1 R157.2 U1.2 U1.4 U2.2 U2.3 U2.10 U2.15 U3.1 U7.2 U7.3 U7.4 U7.5 U8.2 U8.3 U8.4 U8.5 U9.2 U9.3 U9.4 U9.5 U13.2 U13.4 U14.2 U14.3 U14.10 U14.15 U15.1 U19.2 U19.3 U19.4 U19.5 U20.2 U20.3 U20.4 U20.5 U21.2 U21.3 U21.4 U21.5 U24.2 U24.4 U25.2 U25.3 U25.10 U25.15 U26.1 U30.2 U30.3 U30.4 U30.5 U31.2 U31.3 U31.4 U31.5 U32.2 U32.3 U32.4 U32.5 U33.2 U33.3 U33.4 U33.5 U35.2 U35.4 U36.2 U36.3 U36.10 U36.15 U37.1 U41.2 U41.3 U41.4 U41.5 U42.2 U42.3 U42.4 U42.5 U43.2 U43.3 U43.4 U43.5 U46.2 U46.4 U47.2 U47.3 U47.10 U47.15 U48.1 U52.2 U52.3 U52.4 U52.5 U53.2 U53.3 U53.4 U53.5 U54.2 U54.3 U54.4 U54.5 U57.2 U57.4 U58.2 U58.3 U58.10 U58.15 U59.1 U63.2 U63.3 U63.4 U63.5 U64.2 U64.3 U64.4 U64.5 U65.2 U65.3 U65.4 U65.5 U67.2 U67.4 U68.2 U68.3 U68.10 U68.15 U69.1 U73.2 U73.3 U73.4 U73.5 U74.2 U74.3 U74.4 U74.5 U75.2 U75.3 U75.4 U75.5 U78.2 U78.4 U79.2 U79.3 U79.10 U79.15 U80.1 U84.2 U84.3 U84.4 U84.5 U85.2 U85.3 U85.4 U85.5 U86.2 U86.3 U86.4 U86.5
+VS_5V_1: C110.1 C116.2 C117.1 C118.2 C119.1 C120.2 C121.1 C129.2 C130.1 C134.2 IC9.7 R78.2 U35.3(OUT) U38.7 U39.7 U40.7 U45.7
+VS_5V_2: C198.1 C204.2 C205.1 C206.2 C207.1 C208.2 C209.1 C217.2 C218.1 C219.2 C220.1 C224.2 C225.1 C232.2 IC13.7 IC14.5 IC15.7 R133.2 U67.3(OUT) U70.7 U71.7 U72.7 U77.7
+VS_5V_3: C139.1 C145.2 C146.1 C147.2 C148.1 C149.2 C150.1 C157.2 C158.1 C162.2 C163.1 C167.2 IC10.7 IC11.7 R98.2 U46.3(OUT) U49.7 U50.7 U51.7 U56.7
+VS_5V_4: C237.1 C243.2 C244.1 C245.2 C246.1 C247.2 C248.1 C255.1 C256.1 C257.2 C258.2 C259.1 C260.2 C271.2 IC16.5 IC17.5 IC17.6 IC17.7 IC17.8 R155.2 U78.3(OUT) U81.7 U82.7 U83.7 U88.7
+VS_5V_5: C172.1 C178.2 C179.1 C180.2 C181.1 C182.2 C183.1 C190.2 C191.1 IC12.5 U57.3(OUT) U60.7 U61.7 U62.7
+VS_5V_6: C3.1 C9.2 C10.1 C11.2 C12.1 C13.2 C14.1 C21.2 C22.1 C23.2 C24.1 C30.2 C31.2 C38.2 C39.1 IC1.7 IC1.8 IC2.7 IC2.8 IC3.7 IC3.8 R21.2 R23.2 U1.3(OUT) U4.7 U5.7 U6.7 U11.7 U12.7
+VS_5V_7: C43.1 C49.2 C50.1 C51.2 C52.1 C53.2 C54.1 C61.2 C62.1 C69.1 C70.2 C71.2 C76.2 C77.1 IC4.7 IC4.8 IC5.5 IC6.7 IC6.8 R43.2 U13.3(OUT) U16.7 U17.7 U18.7 U23.7
+VS_5V_8: C80.1 C86.2 C87.1 C88.2 C89.1 C90.2 C91.1 C98.2 C99.1 C102.2 C103.1 IC7.5 IC8.1(VCC) U24.3(OUT) U27.7 U28.7 U29.7
-VS_5V_1: C115.2 C122.2 C123.1 C124.2 C125.1 C126.2 C127.1 C136.2 R78.1 U37.3(OUT) U38.4 U39.4 U40.4 U45.4
-VS_5V_2: C203.2 C210.2 C211.1 C212.2 C213.1 C214.2 C215.1 C230.2 C231.1 C234.2 IC14.2 R133.1 U69.3(OUT) U70.4 U71.4 U72.4 U77.4
-VS_5V_3: C144.2 C151.2 C152.1 C153.2 C154.1 C155.2 C156.1 C169.2 R98.1 U48.3(OUT) U49.4 U50.4 U51.4 U56.4
-VS_5V_4: C242.2 C249.2 C250.1 C251.2 C252.1 C253.2 C254.1 C268.2 C269.1 C273.2 IC16.2 R155.1 U80.3(OUT) U81.4 U82.4 U83.4 U88.4
-VS_5V_5: C177.2 C184.2 C185.1 C186.2 C187.1 C188.2 C189.1 C194.2 C195.1 IC12.2 U59.3(OUT) U60.4 U61.4 U62.4
-VS_5V_6: C8.2 C15.2 C16.1 C17.2 C18.1 C19.2 C20.1 C37.2 C40.2 R21.1 R23.1 U3.3(OUT) U4.4 U5.4 U6.4 U11.4 U12.4
-VS_5V_7: C48.2 C55.2 C56.1 C57.2 C58.1 C59.2 C60.1 C67.1 C68.2 C75.2 IC5.2 R43.1 U15.3(OUT) U16.4 U17.4 U18.4 U23.4
-VS_5V_8: C85.2 C92.2 C93.1 C94.2 C95.1 C96.2 C97.1 C100.2 C101.1 IC7.2 U26.3(OUT) U27.4 U28.4 U29.4
TIA_OUT_1: C133.2 R75.1 U38.3
TIA_OUT_2: IC14.1(OUTPUT) R126.2 R127.1 U70.3
TIA_OUT_3: R91.2 R93.1 U49.3
TIA_OUT_4: IC16.1(OUTPUT) R147.2 R149.1 U81.3
TIA_OUT_5: IC12.1(OUTPUT) R109.1 R157.1 U60.3
TIA_OUT_6: IC2.6 U4.3
TIA_OUT_7: IC5.1(OUTPUT) R35.2 U16.3
TIA_OUT_8: IC7.1(OUTPUT) R56.1 R57.1 U27.3
VPD_BIAS_1: C112.1 C128.2 R73.1 U36.12 U36.13
VPD_BIAS_2: C200.1 C216.2 R123.1 U68.12 U68.13
VPD_BIAS_3: C141.1 C161.2 R92.1 U47.12 U47.13
VPD_BIAS_4: C239.1 C262.2 R148.1 U79.12 U79.13
VPD_BIAS_5: C174.1 C192.2 R111.1 U58.12 U58.13
VPD_BIAS_6: C5.1 C29.2 R13.1 U2.12 U2.13
VPD_BIAS_7: C45.1 C66.2 R37.1 U14.12 U14.13
VPD_BIAS_8: C82.1 C107.2 R59.1 U25.12 U25.13
N726539: R63.3(WIPER) U36.8 U36.17
N726581: R63.2 U36.9 U36.16(VREF1)
N730815: R70.2 U41.1(SIG)
N730819: R64.1 R70.1 U38.6(OUT) U39.3
N731167: R64.2 R67.1 U38.2
N742690: R65.2 R68.1 U39.2
N742698: R65.1 R71.1 U39.6(OUT) U40.3
N742854: R71.2 U42.1(SIG)
N743534: R66.2 R69.1 U40.2
N743542: R66.1 R72.1 U40.6(OUT)
N743698: R72.2 U43.1(SIG)
N745050: C132.1 R73.2 U44.2
N745096: IC9.4 R76.2 U44.3
N745537: C131.1 C132.2 IC9.3 R74.1
N745600: C131.2 IC9.1 R74.2
N756581: R76.1 R77.1 U45.6
N758041: R77.2 U45.2
N758422: C135.2 R78.3(WIPER) U45.3
N758794: C133.1 IC9.6
N767006: R113.3(WIPER) U68.8 U68.17
N767020: R113.2 U68.9 U68.16(VREF1)
N767070: R120.2 U73.1(SIG)
N767072: R114.1 R120.1 U70.6(OUT) U71.3
N767094: R114.2 R117.1 U70.2
N767126: R115.2 U71.2
N767130: R115.1 R121.1 U71.6(OUT) U72.3
N767146: R121.2 U74.1(SIG)
N767168: R116.2 R119.1 U72.2
N767172: R116.1 R122.1 U72.6(OUT)
N767186: R122.2 U75.1(SIG)
N771932: C221.1 C222.2 IC13.3 R124.1
N771940: C221.2 IC13.1 R124.2
N772002: C222.1 R123.2 U76.2
N772124: C223.1 IC13.6
N773258: C226.1 IC15.1 R128.1
N773294: C226.2 C227.2 IC15.3 R128.2
N773445: C229.2 IC13.4 IC15.4 R134.1
N773603: C227.1 R129.2 U76.3
N775876: R132.2 U77.2
N775884: R132.1 R134.2 U77.6
N775986: C233.2 R133.3(WIPER) U77.3
N776837: C228.1 IC15.6
N792404: R46.3(WIPER) U25.8 U25.17
N792418: R46.2 U25.9 U25.16(VREF1)
N792468: R53.2 U30.1(SIG)
N792470: R47.1 R53.1 U27.6(OUT) U28.3
N792492: R47.2 R50.1 U27.2
N792524: R48.2 R51.1 U28.2
N792528: R48.1 R54.1 U28.6(OUT) U29.3
N792544: R54.2 U31.1(SIG)
N792566: R49.2 R52.1 U29.2
N792570: R49.1 R55.1 U29.6(OUT)
N792584: R55.2 U32.1(SIG)
N794420: C104.2 R59.2 U34.2
N794534: C106.2 R60.1
N795928: IC8.3 R62.1 U34.3
N797403: C106.1 IC8.6
N797529: IC7.4 R57.2 R60.2
N798674: C105.1 R58.1
N799083: C105.2 IC8.7
N799799: IC7.3 R58.2 R61.1
N800311: R56.2 U33.1(SIG)
N801268: R25.3(WIPER) U14.8 U14.17
N801282: R25.2 U14.9 U14.16(VREF1)
N801332: R32.2 U19.1(SIG)
N801334: R26.1 R32.1 U16.6(OUT) U17.3
N801356: R26.2 R29.1 U16.2
N801388: R27.2 R30.1 U17.2
N801392: R27.1 R33.1 U17.6(OUT) U18.3
N801408: R33.2 U20.1(SIG)
N801430: R28.2 R31.1 U18.2
N801434: R28.1 R34.1 U18.6(OUT)
N801448: R34.2 U21.1(SIG)
N808788: R79.3(WIPER) U47.8 U47.17
N808802: R79.2 U47.9 U47.16(VREF1)
N808852: R86.2 U52.1(SIG)
N808854: R80.1 R86.1 U49.6(OUT) U50.3
N808876: R80.2 R83.1 U49.2
N808908: R81.2 R84.1 U50.2
N808912: R81.1 R87.1 U50.6(OUT) U51.3
N808928: R87.2 U53.1(SIG)
N808950: R82.2 R85.1 U51.2
N808954: R82.1 R88.1 U51.6(OUT)
N808968: R88.2 U54.1(SIG)
N811585: C159.1 C164.1 IC10.3 IC11.3 R89.1 R94.1 U55.3
N811593: C164.2 IC11.1 R94.2
N811777: C166.1 IC11.6
N811785: C166.2 R93.2 R95.1
N811825: IC10.4 IC11.4 R96.2
N811897: R97.2 U56.2
N811905: R96.1 R97.1 U56.6
N812007: C168.2 R98.3(WIPER) U56.3
N812726: C159.2 IC10.1 R89.2
N812844: C160.1 IC10.6
N812852: C160.2 R90.1 R91.1
N813486: C165.1 R92.2 U55.2
N816117: C193.1 R111.2 U66.2
N816191: IC12.3 R112.1 U66.3
N816627: IC12.4 R109.2 R110.1
N817534: R99.3(WIPER) U58.8 U58.17
N817548: R99.2 U58.9 U58.16(VREF1)
N817598: R106.2 U63.1(SIG)
N817600: R100.1 R106.1 U60.6(OUT) U61.3
N817622: R100.2 R103.1 U60.2
N817654: R101.2 R104.1 U61.2
N817658: R101.1 R107.1 U61.6(OUT) U62.3
N817674: R107.2 U64.1(SIG)
N817696: R102.2 R105.1 U62.2
N817700: R102.1 R108.1 U62.6(OUT)
N817714: R108.2 U65.1(SIG)
N823976: R1.3(WIPER) U2.8 U2.17
N823990: R1.2 U2.9 U2.16(VREF1)
N824040: R8.2 U7.1(SIG)
N824042: R2.1 R8.1 U4.6(OUT) U5.3
N824064: R2.2 R5.1 U4.2
N824096: R3.2 R6.1 U5.2
N824100: R3.1 R9.1 U5.6(OUT) U6.3
N824116: R9.2 U8.1(SIG)
N824138: R4.2 R7.1 U6.2
N824142: R4.1 R10.1 U6.6(OUT)
N824156: R10.2 U9.1(SIG)
N826014: C26.1 IC1.3 R11.1 R15.1 R17.2 U10.3
N826022: C26.2 IC1.1 R11.2
N826054: R19.1 R24.2 U12.6
N826080: R19.2 U12.2
N826090: C36.2 R23.3(WIPER) U12.3
N826110: C27.1 C28.2 IC2.3 R12.1 R14.2
N826120: C25.2 R13.2 U10.2
N826146: C33.1 IC1.4 R24.1
N826154: C28.1 IC1.6 R14.1 R16.2
N827763: IC3.4 R16.1
N828053: IC3.6 R17.1
N835449: C63.2 R37.2 U22.2
N835457: C64.1 IC4.3 R36.1 R39.1 R41.2 U22.3
N835465: C64.2 IC4.1 R36.2
N835631: C65.1 IC4.6 R38.1 R40.2
N835651: C65.2 IC5.4 R35.1 R38.2
N835659: C72.1 IC4.4 R44.1
N835855: IC6.4 R40.1
N835875: R42.2 U23.2
N835883: R42.1 R44.2 U23.6
N835997: C74.2 R43.3(WIPER) U23.3
N836862: C27.2 IC2.1 R12.2
N838057: C73.2 IC6.1
N838070: C73.1 IC6.3 R45.1
N838543: C34.1 IC3.3 R20.2
N838571: C34.2 IC3.1
N849193: C223.2 R125.1
N849197: IC14.4 R125.2 R126.1
N849750: IC14.3 R130.1 R131.2
N850088: C228.2 R130.2
N852033: R18.2 U11.2
N852041: R18.1 R22.2 U11.6
N852155: C35.2 R21.3(WIPER) U11.3
N852175: C32.1 IC2.4 R22.1
N856246: IC6.6 R41.1
N865430: R135.2 U79.9 U79.16(VREF1)
N865510: R135.3(WIPER) U79.8 U79.17
N866146: R136.2 R139.1 U81.2
N866154: R136.1 R142.1 U81.6(OUT) U82.3
N866194: R137.2 R140.1 U82.2
N866202: R137.1 R143.1 U82.6(OUT) U83.3
N866242: R138.2 R141.1 U83.2
N866250: R138.1 R144.1 U83.6(OUT)
N866650: R142.2 U84.1(SIG)
N866654: R143.2 U85.1(SIG)
N866658: R144.2 U86.1(SIG)
N868199: C261.1 C264.2 IC17.11 R145.1
N868207: C261.2 C263.1 IC17.10 R145.2
N868323: C264.1 R148.2 U87.2
N868405: C265.2 C267.1 IC17.2 R151.1
N868453: C266.1 C267.2 IC17.3 R151.2
N868461: C265.1 R150.1 U87.3
N878497: C263.2 R146.1
N878501: IC16.4 R146.2 R147.1
N878607: IC16.3 R152.1 R153.2
N879009: C266.2 R152.2
N879226: C270.2 IC17.4 IC17.9 R156.1
N889164: R154.2 U88.2
N889172: R154.1 R156.2 U88.6
N889286: C272.2 R155.3(WIPER) U88.3

Pads without a net: IC1 2; IC2 2; IC3 2; IC4 2; IC6 2; IC8 2 4; IC9 2 8; IC10 2 8; IC11 2 8; IC13 2 8; IC15 2 8; IC17 1 12; JP1 1; JP2 1; JP3 1; JP4 1; JP5 1; JP6 1; JP7 1; JP8 1; U4 1 5 8; U5 1 5 8; U6 1 5 8; U10 1; U11 1 5 8; U12 1 5 8; U16 1 5 8; U17 1 5 8; U18 1 5 8; U22 1; U23 1 5 8; U27 1 5 8; U28 1 5 8; U29 1 5 8; U34 1; U38 1 5 8; U39 1 5 8; U40 1 5 8; U44 1; U45 1 5 8; U49 1 5 8; U50 1 5 8; U51 1 5 8; U55 1; U56 1 5 8; U60 1 5 8; U61 1 5 8; U62 1 5 8; U66 1; U70 1 5 8; U71 1 5 8; U72 1 5 8; U76 1; U77 1 5 8; U81 1 5 8; U82 1 5 8; U83 1 5 8; U87 1; U88 1 5 8

## Via types
v1: diameter 0.61, hole 0.33, TOP to BOTTOM, 41 vias

## Routing (per net, layer and track width the routed paths; a pad name or vN(x,y) marks a point on that pad's centre or on a via; arc(x,y) is an arc through that point)
12V_1: length 38
  TOP w1: U36.23 331.01,142.92 331.02,142.93 C111.1
  BOTTOM w1: U35.1 C109.1 314.52,140.43 C108.1 314.5,142.6 JP4.4 320.8,139.07 U36.23 U36.22
12V_2: length 32.8
  TOP w1: C199.1 240.98,142.96 241.01,142.92 U68.23 228.25,141.62 JP7.4 224.5,142.3 224.5,142.3 224.5,140.04 224.48,140.02 224.48,137.3 224.47,137.29 U67.1
12V_3: length 52.1
  TOP w1: 134.5,145.37 138.29,141.58 149.67,141.58 149.71,141.62 U47.23 ; 134.5,145.37 C137.1 134.5,142.32 C138.1 U46.1 ; 134.5,145.37 JP5.4 ; U47.23 151.01,142.92 151.04,142.95 C140.1 ; U47.23 U47.22
  BOTTOM w0.334: 153.56,140.76 U47.22 ; U47.22 152.7,141.62 ; U47.22 153.56,142.47 ; U47.22 154.41,141.62 ; 151.01,140.76 U47.23 ; U47.23 151.01,142.47 ; U47.23 150.16,141.62 ; U47.23 151.87,141.62 ; U46.1 135.69,136.05 ; U46.1 133.31,136.05 ; U46.1 134.5,134.86 ; U46.1 134.5,137.24 ; JP5.4 135.88,145.37 ; JP5.4 134.5,146.75 ; JP5.4 133.12,145.37 ; JP5.4 134.5,143.99
12V_4: length 35.9
  TOP w1: C238.1 61.08,61.99 61.02,61.92 61.02,60.61
  BOTTOM w1: 63.56,60.61 49.26,60.61 JP8.4 44.5,62.47 C235.1 44.48,62.45 C236.1 44.48,57.71 44.5,57.69 U78.1
12V_5: length 48.5
  TOP w1: U58.22 U58.23 ; U58.23 59.55,142.41 59.55,142.41 59.55,143.43 59.54,143.44 C173.1 ; U58.23 49.17,141.1 JP6.4 44.88,142.3 C170.1 44.81,142.23 44.81,140.13 C171.1 44.81,139.02 44.82,139.01 U57.1
  BOTTOM w0.334: 61.23,141.1 U58.22 ; U58.22 62.08,141.96 ; U58.22 62.08,140.24 ; U58.22 62.94,141.1 ; U57.1 44.82,137.36 ; U57.1 43.63,136.17 ; U57.1 46.01,136.17 ; JP6.4 44.88,146.77 ; JP6.4 43.5,145.39 ; JP6.4 44.88,144.01 ; JP6.4 46.26,145.39 ; 58.69,141.1 U58.23 ; U58.23 59.55,141.96 ; U58.23 59.55,140.24 ; U58.23 60.4,141.1
12V_6: length 13.8
  TOP w1: U2.22 C4.1
  BOTTOM w1: U1.1 121.78,72.46 121.79,72.47 C2.1 123.16,72.45 C1.1 125.56,72.45 JP1.4
12V_7: length 14.2
  TOP w1: U14.22 C44.1
  BOTTOM w1: JP2.4 215.31,72.85 C41.1 212.62,72.84 C42.1 211.51,72.84 211.5,72.85 U13.1
12V_8: length 15.1
  TOP w1: U25.23 314.07,44.19 314.04,44.22 C81.1
  BOTTOM w1: JP3.4 306.23,72.5 306.23,72.5 C78.1 302.8,72.5 302.8,72.5 C79.1 U24.1
-12V_1: length 15.1
  TOP w1: U37.2 302.56,153.28 302.58,153.26 C114.2 304.96,153.26 304.97,153.26 C113.2 308.45,153.26 308.49,153.29 JP4.2
-12V_2: length 15.2
  TOP w1: U69.2 210.87,153.29 210.87,153.29 C202.2 214.69,153.29 214.7,153.3 C201.2 218.4,153.3 218.41,153.29 JP7.2
-12V_3: length 23.9
  TOP w1: JP5.2 128.58,153.29 128.57,153.3 C142.2 125.02,153.3 125,153.31 C143.2 122.6,153.31 122.53,153.38 U48.2
  BOTTOM w0.334: 119.53,152.25 U48.2 ; U48.2 118.4,153.38 ; U48.2 120.66,153.38 ; JP5.2 134.5,154.67 ; JP5.2 134.5,151.91 ; JP5.2 135.88,153.29 ; JP5.2 133.12,153.29
-12V_4: length 15
  TOP w1: U80.2 31.1,73.3 31.1,73.3 C241.2 34.78,73.3 34.8,73.28 C240.2 38.43,73.28 38.45,73.29 JP8.2
-12V_5: length 29.2
  TOP w1: U59.2 27.6,152.51 28.13,153.04 C176.2 33.94,153.04 34,153.1 C175.2 38.01,153.1 38.23,153.31 JP6.2
  BOTTOM w0.334: 44.88,151.93 JP6.2 ; JP6.2 46.26,153.31 ; JP6.2 43.5,153.31 ; JP6.2 44.88,154.69 ; U59.2 27.15,152.51 ; U59.2 26.02,153.64 ; U59.2 24.89,152.51 ; U59.2 26.02,151.38
-12V_6: length 15.4
  TOP w1: U3.2 136.6,60.28 136.6,60.28 C7.2 136.6,63.03 136.6,63.04 C6.2 136.6,66.52 136.6,66.53 JP1.2
-12V_7: length 15.3
  TOP w1: U15.2 226.31,59.47 226.32,59.49 C47.2 226.32,63.29 226.33,63.3 C46.2 226.33,66.78 226.33,66.79 JP2.2
-12V_8: length 19.2
  TOP w1: JP3.2 319.96,68.52 C83.2 327.83,68.52 327.89,68.58 C84.2 331.8,68.58 331.92,68.46 U26.2
GND: length 493.4
  TOP w0.334: 317.04,24.9 R50.2 ; R50.2 317.62,24.24 ; R50.2 317.62,25.56 ; R50.2 318.21,24.9 ; U25.10 335.25,58.12 ; U25.10 334.39,58.98 ; U25.10 333.53,58.12 ; U25.10 334.39,57.26 ; C82.2 338.18,50.5 ; C82.2 337.37,49.69 ; C82.2 336.55,50.5 ; C82.2 337.37,51.31 ; U33.5 321.05,26.03 ; U33.5 319.92,24.9 ; U33.5 321.05,23.77 ; U33.5 322.18,24.9 ; U24.2 299.19,69.96 ; U24.2 296.81,69.96 ; U24.2 298,71.15 ; U24.2 298,68.77 ; 345,30.07 R62.2 ; R62.2 345,31.69 ; R62.2 343.82,30.88 ; R62.2 346.18,30.88 ; U31.2 294.04,16.26 ; U31.2 294.04,14 ; U31.2 295.17,15.13 ; U31.2 292.91,15.13 ; 335.35,31.09 IC8.8 ; IC8.8 336.29,31.6 ; IC8.8 337.23,31.09 ; IC8.8 336.29,30.59 ; 305.6,14.77 306.73,14.77 ; 305.6,14.77 304.46,14.77 ; 305.6,14.77 305.6,15.9 ; 305.6,14.77 305.6,13.63 ; 274.95,26.61 U32.2 ; U32.2 276.08,27.74 ; U32.2 277.22,26.61 ; U32.2 276.08,25.48 ; U25.3 317.47,58.12 ; U25.3 315.75,58.12 ; U25.3 316.61,57.26 ; U25.3 316.61,58.98 ; 326.13,18.69 U33.3 ; U33.3 327.26,19.82 ; U33.3 326.13,20.95 ; U33.3 325,19.82 ; 310.68,18.71 U30.4 ; U30.4 311.81,19.84 ; U30.4 309.54,19.84 ; U30.4 310.68,20.98 ; U25.2 314.07,58.98 ; U25.2 313.21,58.12 ; U25.2 314.93,58.12 ; U25.2 314.07,57.26 ; R61.2 329.77,30.69 ; R61.2 329.77,29.37 ; R61.2 329.19,30.03 ; R61.2 330.36,30.03 ; 335.88,38.52 C107.1 ; C107.1 336.69,37.34 ; C107.1 337.5,38.52 ; C107.1 336.69,39.7 ; C81.2 314.04,54.43 ; C81.2 312.74,52.93 ; C81.2 314.04,51.43 ; C81.2 315.34,52.93 ; 299.12,19.08 U31.4 ; U31.4 297.99,20.21 ; U31.4 299.12,21.34 ; U31.4 300.25,20.21 ; C96.1 292.53,32.3 ; C96.1 291.37,32.3 ; C96.1 291.95,31.64 ; C96.1 291.95,32.96 ; 314.19,32.38 C92.1 ; C92.1 315.36,32.38 ; C92.1 314.77,31.71 ; C92.1 314.77,33.04 ; 290.63,33.52 C97.2 ; C97.2 289.82,34.7 ; C97.2 291.44,34.7 ; C97.2 290.63,35.88 ; 302.39,32.2 C94.1 ; C94.1 303.56,32.2 ; C94.1 302.98,32.86 ; C94.1 302.98,31.54 ; U32.5 277.22,31.69 ; U32.5 276.08,32.82 ; U32.5 276.08,30.56 ; U32.5 274.95,31.69 ; 283.39,67.75 U24.4 ; U24.4 285.61,69.96 ; U24.4 281.19,69.96 ; U24.4 283.39,72.17 ; U26.1 333.5,72.13 ; U26.1 334.63,71 ; U26.1 333.5,69.87 ; U26.1 332.37,71 ; U33.4 326.13,26.03 ; U33.4 325,24.9 ; U33.4 326.13,23.77 ; U33.4 327.26,24.9 ; 325.5,72 C83.1 ; C83.1 326.8,73.5 ; C83.1 324.2,73.5 ; C83.1 325.5,75 ; R52.2 294.9,25.46 ; R52.2 294.31,24.8 ; R52.2 295.48,24.8 ; R52.2 294.9,24.14 ; 339.42,69.41 C85.1 ; C85.1 340.72,70.91 ; C85.1 339.42,72.41 ; C85.1 338.12,70.91 ; U30.3 311.81,14.77 ; U30.3 310.68,15.9 ; U30.3 309.54,14.77 ; U30.3 310.68,13.63 ; 321.05,18.69 U33.2 ; U33.2 321.05,20.95 ; U33.2 322.18,19.82 ; U33.2 319.92,19.82 ; 341.09,26.75 C102.1 ; C102.1 341.75,27.33 ; C102.1 342.41,26.75 ; C102.1 341.75,26.17 ; 281.17,30.56 U32.4 ; U32.4 281.17,32.82 ; U32.4 282.3,31.69 ; U32.4 280.03,31.69 ; 344.25,24.57 C103.2 ; C103.2 344.25,26.19 ; C103.2 345.43,25.38 ; C103.2 343.07,25.38 ; 336.29,34.4 IC8.5 ; IC8.5 337.23,34.91 ; IC8.5 335.35,34.91 ; IC8.5 336.29,35.41 ; 305.87,24.21 R51.2 ; R51.2 306.46,24.88 ; R51.2 305.29,24.88 ; R51.2 305.87,25.54 ; 321.15,35.76 C98.1 ; C98.1 321.15,37.09 ; C98.1 321.73,36.42 ; C98.1 320.57,36.42 ; 328.34,70 C84.1 ; C84.1 329,70.58 ; C84.1 329,69.42 ; C84.1 329.66,70 ; 305.6,19.84 306.73,19.84 ; 305.6,19.84 305.6,20.98 ; 305.6,19.84 305.6,18.71 ; 305.6,19.84 304.46,19.84 ; 310.64,72.5 JP3.3 ; JP3.3 312.02,73.88 ; JP3.3 312.02,71.12 ; JP3.3 313.4,72.5 ; 333.53,42.88 U25.15 ; U25.15 334.39,42.02 ; U25.15 335.25,42.88 ; U25.15 334.39,43.74 ; C99.2 319.82,39.82 ; C99.2 319.01,38.64 ; C99.2 320.63,38.64 ; C99.2 319.82,37.46 ; 313.48,33.47 C93.2 ; C93.2 312.67,34.65 ; C93.2 313.48,35.83 ; C93.2 314.29,34.65 ; 326.73,46.67 R46.1 ; R46.1 325.85,47.85 ; R46.1 326.73,49.03 ; R46.1 327.61,47.85 ; U31.5 295.17,20.21 ; U31.5 292.91,20.21 ; U31.5 294.04,21.34 ; U31.5 294.04,19.08 ; 347,40.31 C104.1 ; C104.1 347,41.93 ; C104.1 345.82,41.12 ; C104.1 348.18,41.12 ; 293,59.82 C80.2 ; C80.2 293,62.42 ; C80.2 294.5,61.12 ; C80.2 291.5,61.12 ; U32.3 281.17,27.74 ; U32.3 282.3,26.61 ; U32.3 280.03,26.61 ; U32.3 281.17,25.48 ; 297.99,15.13 U31.3 ; U31.3 300.25,15.13 ; U31.3 299.12,16.26 ; U31.3 299.12,14 ; C95.2 301.63,35.61 ; C95.2 301.63,33.24 ; C95.2 302.44,34.42 ; C95.2 300.82,34.42
  TOP w1: U14.15 U14.10 ; C44.2 U14.3 ; U58.15 79.86,142.41 79.85,142.42 79.85,152.22 79.86,152.24 U58.10 ; U47.2 151.01,153.56 151.04,153.54 C140.2 ; U79.10 U79.15 ; C199.2 240.98,153.48 241.01,153.51 U68.2 ; U36.2 331.01,153.53 331.02,153.53 C111.2 ; U2.15 U2.10 ; U36.10 U36.15 ; C4.2 U2.3 ; U68.10 U68.15 ; C173.2 59.54,152.55 59.55,152.55 U58.2 U58.3 ; 171.34,156.85 171.34,152.94 171.34,152.94 171.34,142.93 171.34,142.92 171.34,141.62
  BOTTOM w0.334: JP3.3 312.02,73.88 ; JP3.3 310.64,72.5 ; JP3.3 313.4,72.5 ; JP3.3 312.02,71.12 ; 305.6,14.77 306.73,14.77 ; 305.6,14.77 305.6,13.63 ; 305.6,14.77 304.46,14.77 ; 305.6,14.77 305.6,15.9 ; 300.84,71.08 C79.2 ; C79.2 301.5,70.49 ; C79.2 302.16,71.08 ; C79.2 301.5,71.66 ; U33.5 322.18,24.9 ; U33.5 319.92,24.9 ; U33.5 321.05,26.03 ; U33.5 321.05,23.77 ; 274.95,26.61 U32.2 ; U32.2 276.08,25.48 ; U32.2 276.08,27.74 ; U32.2 277.22,26.61 ; U25.2 314.93,58.12 ; U25.2 314.07,58.98 ; U25.2 313.21,58.12 ; U25.2 314.07,57.26 ; U30.4 311.81,19.84 ; U30.4 310.68,18.71 ; U30.4 309.54,19.84 ; U30.4 310.68,20.98 ; U33.2 322.18,19.82 ; U33.2 319.92,19.82 ; U33.2 321.05,18.69 ; U33.2 321.05,20.95 ; 334.39,57.26 U25.10 ; U25.10 333.53,58.12 ; U25.10 335.25,58.12 ; U25.10 334.39,58.98 ; U26.1 333.5,72.13 ; U26.1 333.5,69.87 ; U26.1 332.37,71 ; U26.1 334.63,71 ; 292.91,15.13 U31.2 ; U31.2 295.17,15.13 ; U31.2 294.04,14 ; U31.2 294.04,16.26 ; 313.17,22.79 C87.2 ; C87.2 312.36,23.98 ; C87.2 313.17,25.16 ; C87.2 313.98,23.98 ; 305.6,19.84 305.6,20.98 ; 305.6,19.84 305.6,18.71 ; 305.6,19.84 304.46,19.84 ; 305.6,19.84 306.73,19.84 ; 329.24,26.72 C101.2 ; C101.2 328.43,27.9 ; C101.2 329.24,29.08 ; C101.2 330.05,27.9 ; U25.3 317.47,58.12 ; U25.3 315.75,58.12 ; U25.3 316.61,58.98 ; U25.3 316.61,57.26 ; 333.53,42.88 U25.15 ; U25.15 334.39,43.74 ; U25.15 335.25,42.88 ; U25.15 334.39,42.02 ; U30.3 310.68,15.9 ; U30.3 309.54,14.77 ; U30.3 311.81,14.77 ; U30.3 310.68,13.63 ; C88.1 300.12,26.74 ; C88.1 300.12,25.41 ; C88.1 300.71,26.08 ; C88.1 299.54,26.08 ; 298,68.77 U24.2 ; U24.2 299.19,69.96 ; U24.2 296.81,69.96 ; U24.2 298,71.15 ; 280.03,26.61 U32.3 ; U32.3 281.17,25.48 ; U32.3 282.3,26.61 ; U32.3 281.17,27.74 ; 289.1,25.36 C90.1 ; C90.1 288.52,26.02 ; C90.1 289.1,26.69 ; C90.1 289.68,26.02 ; U31.3 300.25,15.13 ; U31.3 299.12,16.26 ; U31.3 297.99,15.13 ; U31.3 299.12,14 ; C89.2 301.45,25.08 ; C89.2 301.45,22.72 ; C89.2 300.63,23.9 ; C89.2 302.26,23.9 ; U33.3 327.26,19.82 ; U33.3 326.13,20.95 ; U33.3 325,19.82 ; U33.3 326.13,18.69 ; U31.5 294.04,21.34 ; U31.5 294.04,19.08 ; U31.5 292.91,20.21 ; U31.5 295.17,20.21 ; 290.37,22.67 C91.2 ; C91.2 290.37,25.03 ; C91.2 291.18,23.85 ; C91.2 289.56,23.85 ; 311.29,26.25 C86.1 ; C86.1 311.88,25.59 ; C86.1 311.88,26.91 ; C86.1 312.46,26.25 ; 281.19,69.96 U24.4 ; U24.4 285.61,69.96 ; U24.4 283.39,67.75 ; U24.4 283.39,72.17 ; 303.25,69.76 C78.2 ; C78.2 304.43,68.95 ; C78.2 305.61,69.76 ; C78.2 304.43,70.57 ; U31.4 300.25,20.21 ; U31.4 297.99,20.21 ; U31.4 299.12,21.34 ; U31.4 299.12,19.08 ; 327.3,30.05 C100.1 ; C100.1 327.88,29.39 ; C100.1 327.88,30.71 ; C100.1 328.46,30.05 ; U33.4 327.26,24.9 ; U33.4 326.13,23.77 ; U33.4 326.13,26.03 ; U33.4 325,24.9 ; U32.5 277.22,31.69 ; U32.5 276.08,32.82 ; U32.5 276.08,30.56 ; U32.5 274.95,31.69 ; 281.17,30.56 U32.4 ; U32.4 281.17,32.82 ; U32.4 282.3,31.69 ; U32.4 280.03,31.69
  BOTTOM w1: 61.02,75.86 61.02,70.75 ; U68.2 241.01,151.29
